# Altium PCB 175-00008 rev 2, PCB, M2 Focus Drive.PcbDoc (part 1 of 3)
Units mil, origin at the board's own origin, x right, y up, seen from the top; angles counter-clockwise.
Board outline 6885.96 x 6885.86 mil, 9 copper layers (Top Layer (*.GTL), Mid-Layer 1 (*.G1), +24V (*.GP1), GND (*.GP2), +5V (*.GP3), +12V (*.GP4), -12V (*.GP5), +3.3V (*.GP6), Bottom Layer (*.GBL)), stack 52.6 mil thick; 154 components, 154 nets, 874 pads, 365 vias.
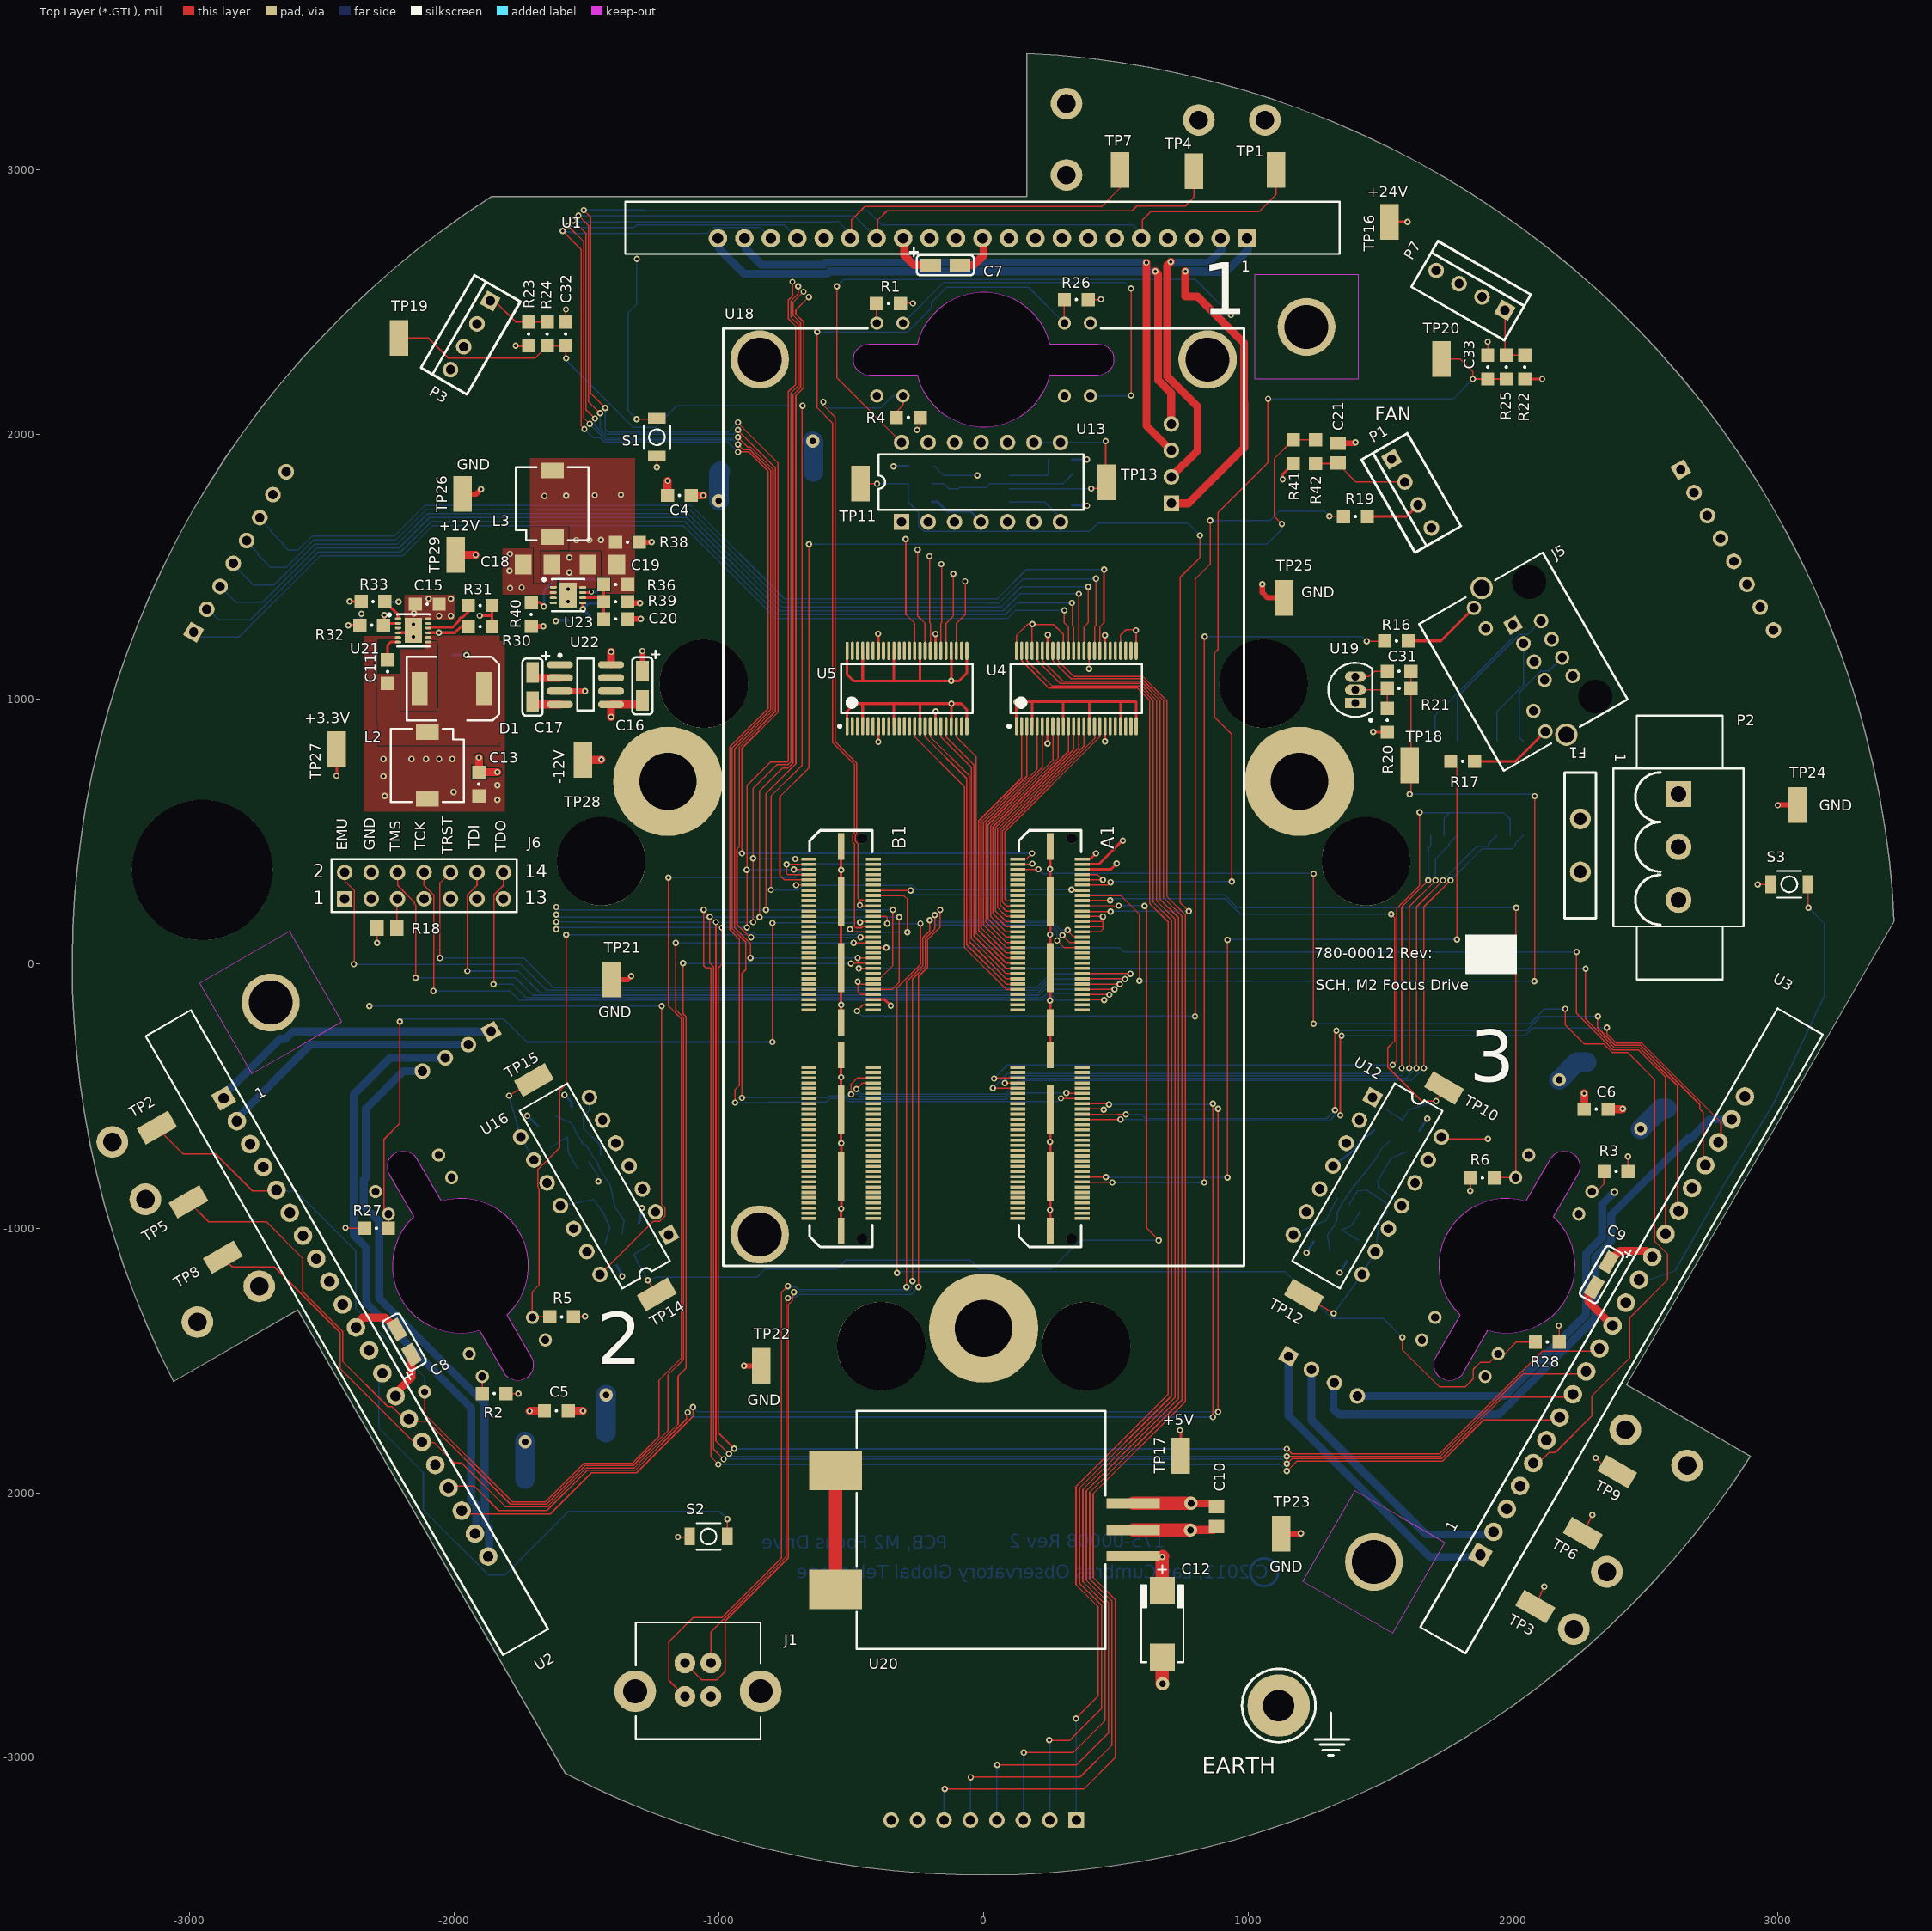
[diagram p0: Top Layer (*.GTL) view]
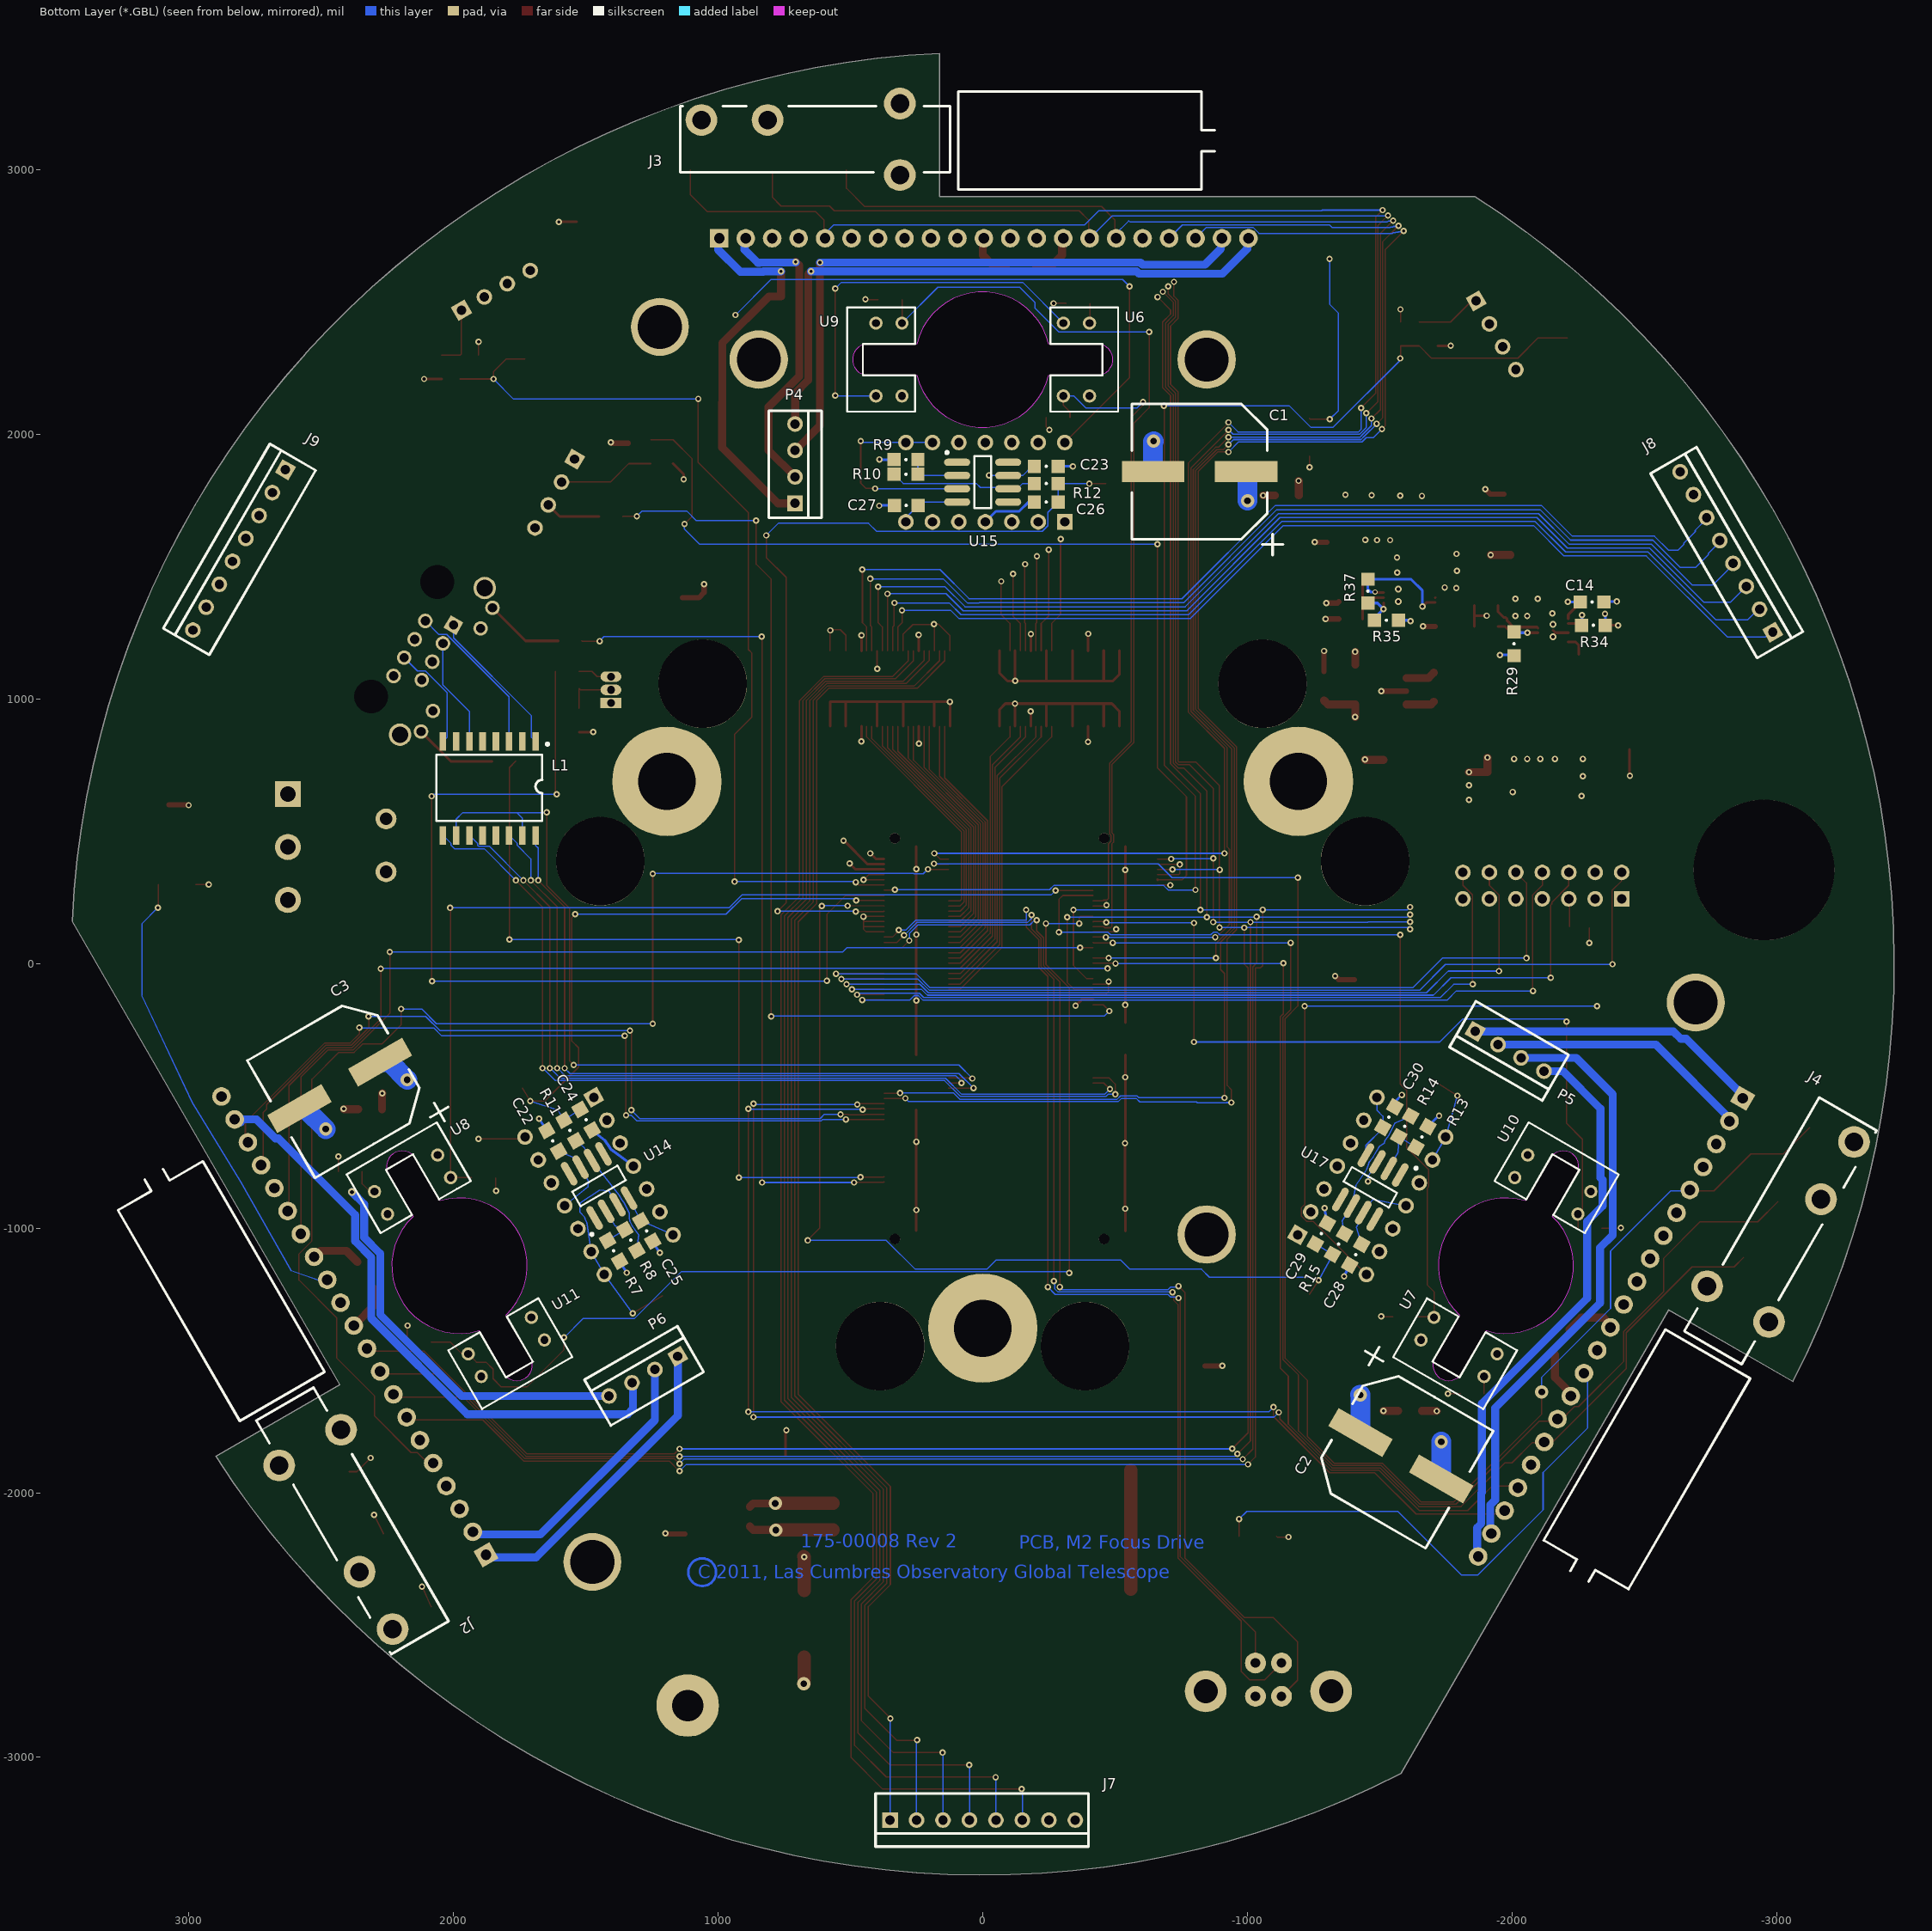
[diagram p1: Bottom Layer (*.GBL) view, seen from below]
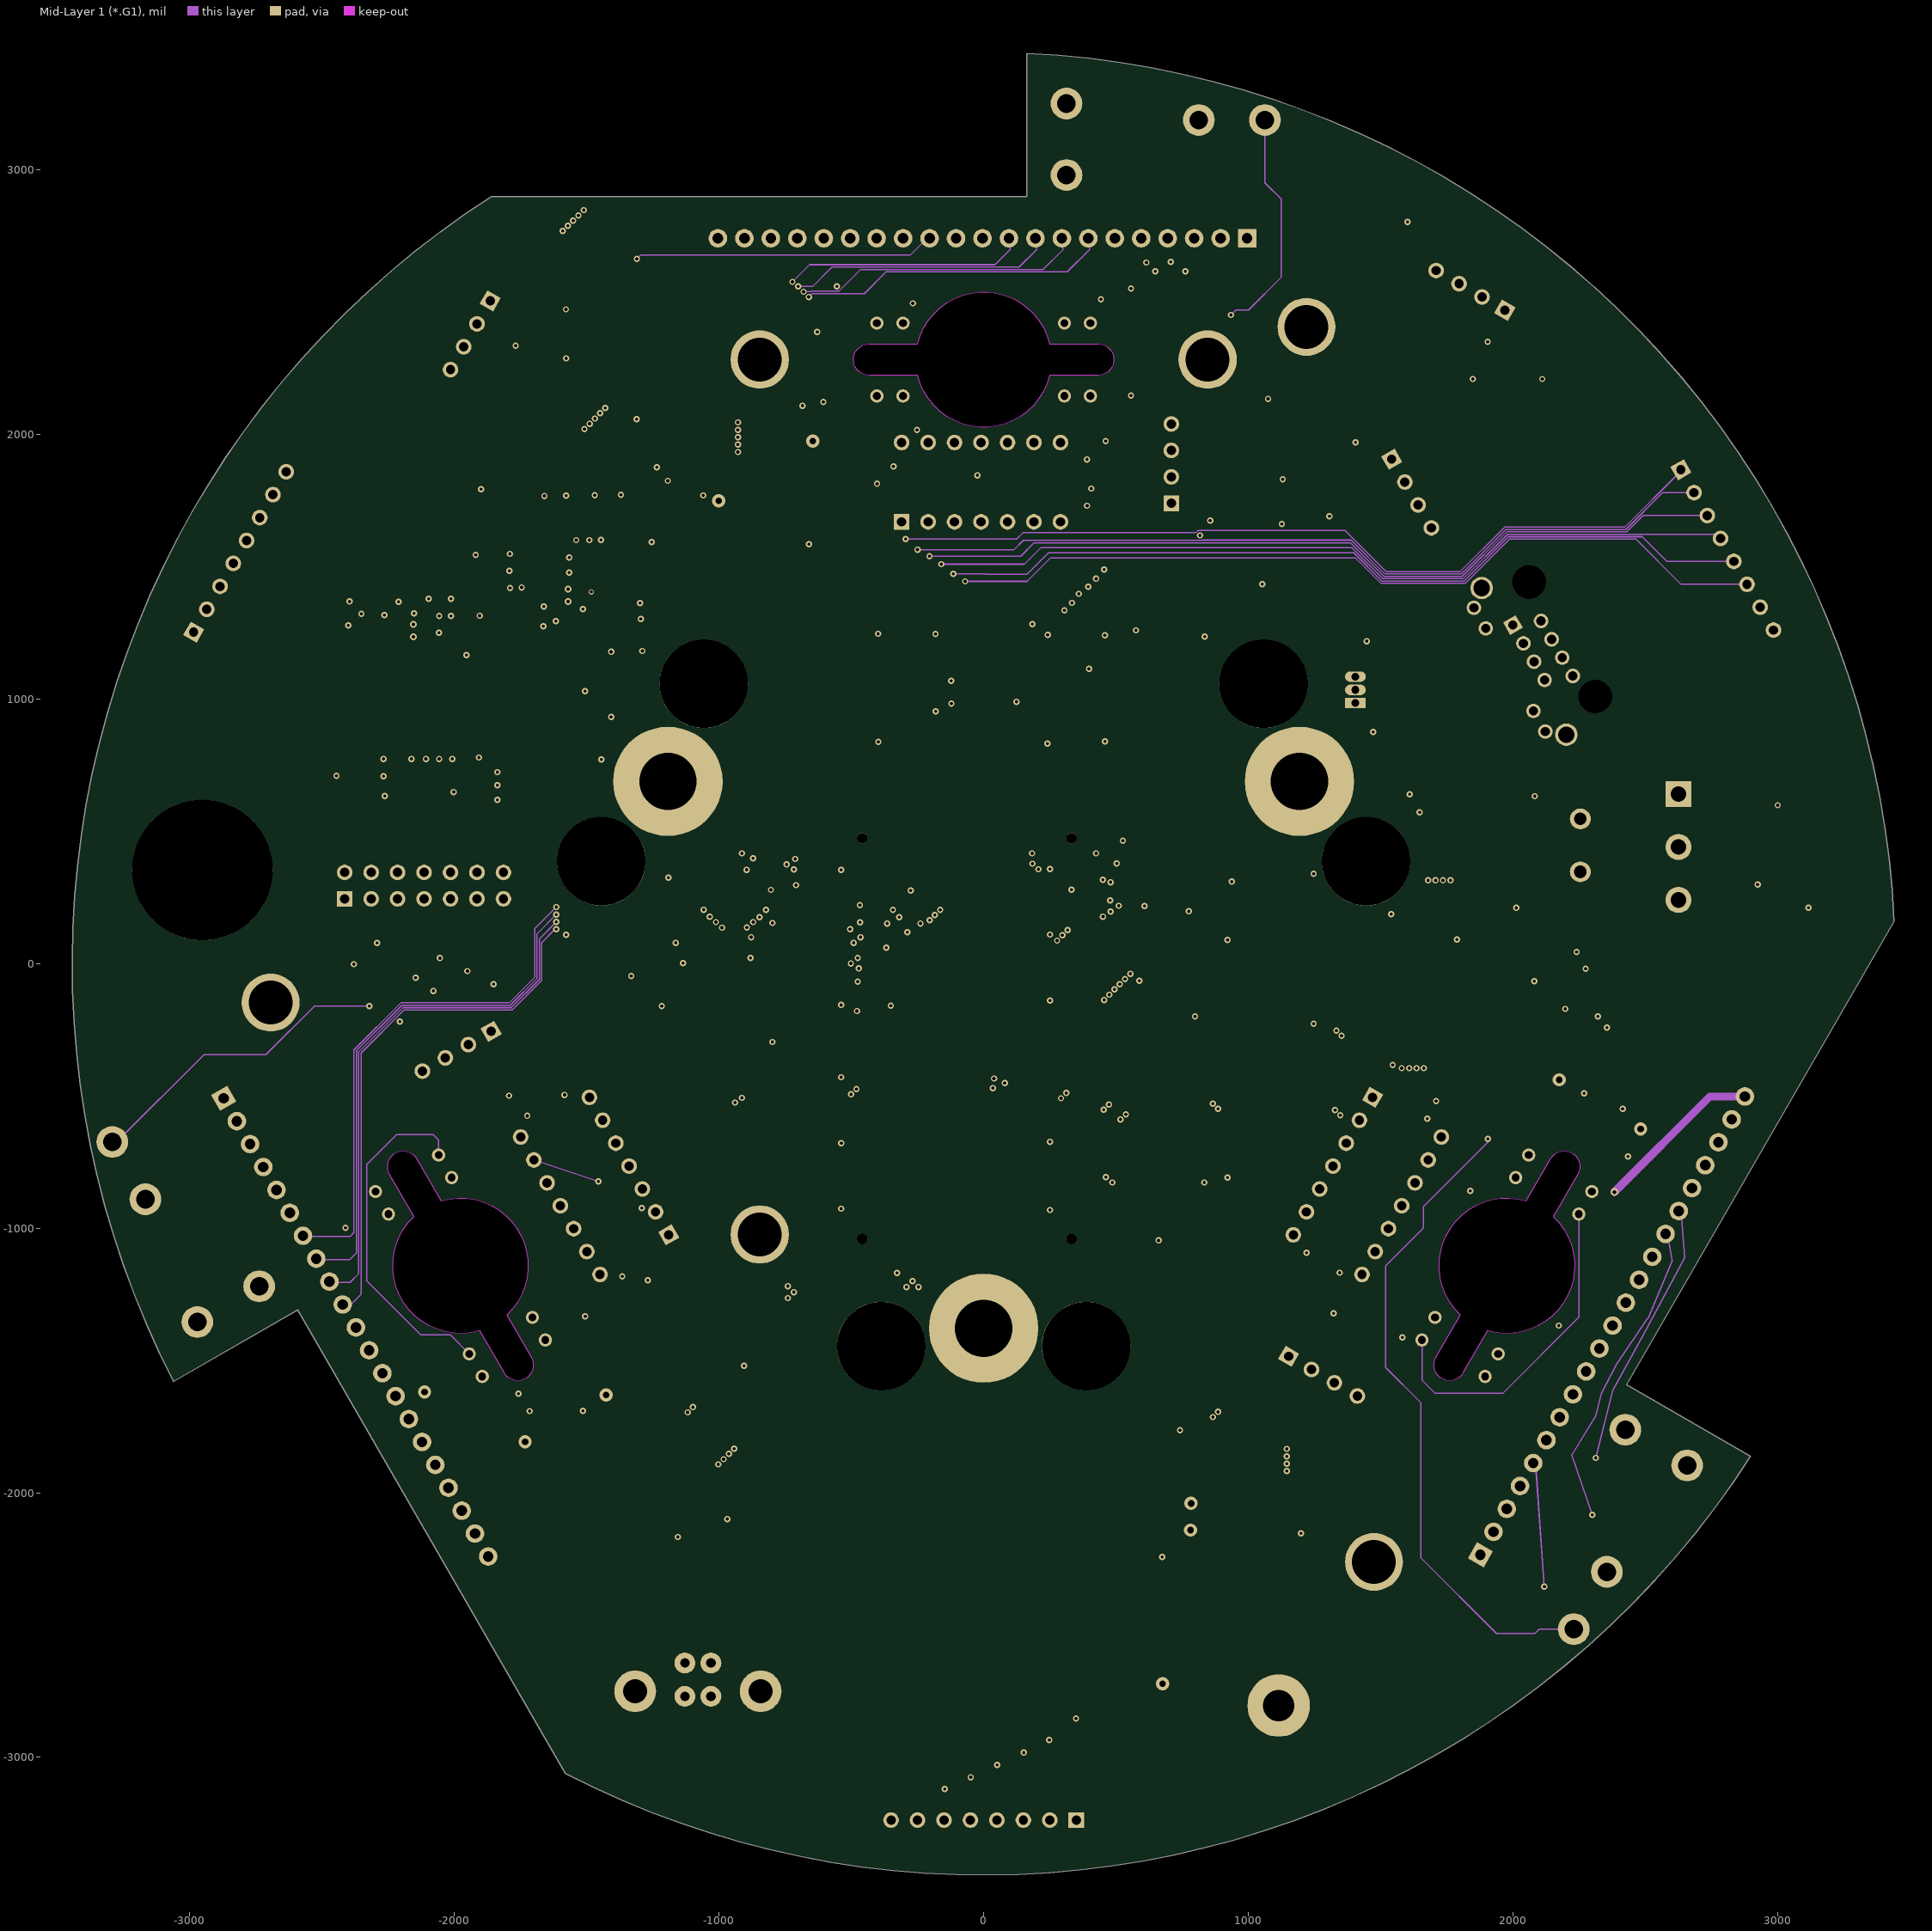
[diagram p2: Mid-Layer 1 (*.G1)]
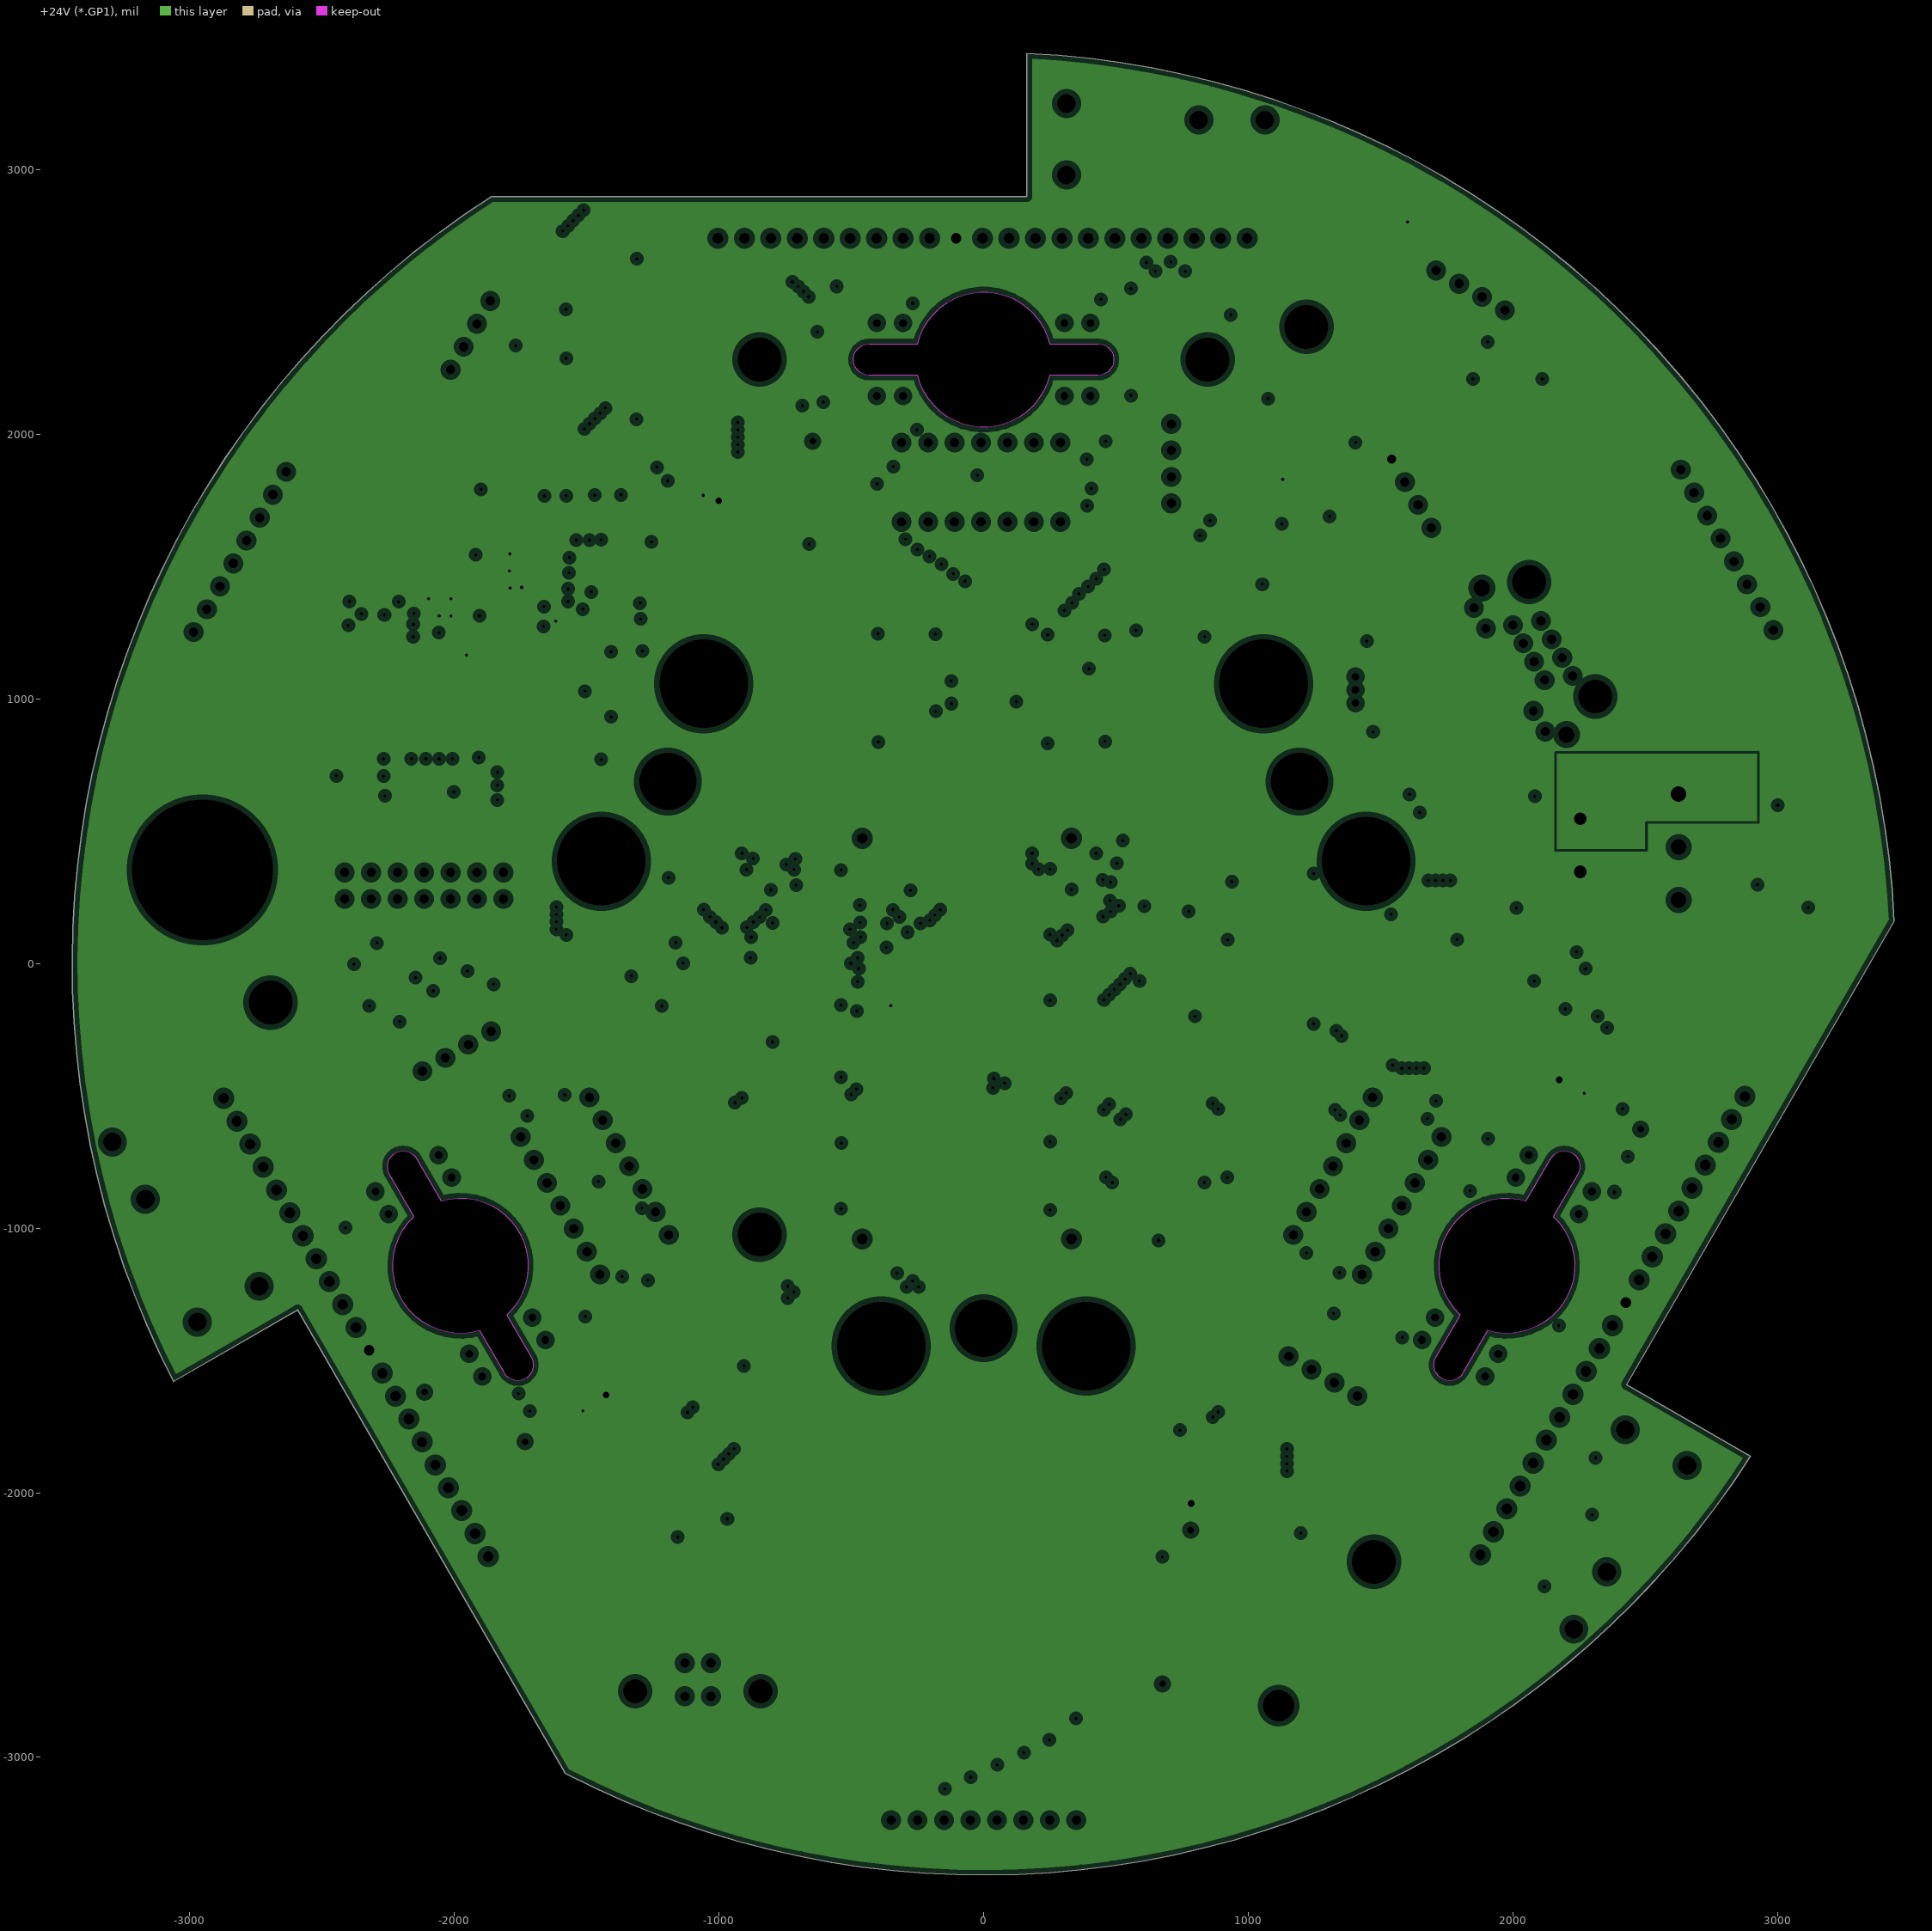
[diagram p3: +24V (*.GP1), clearances drawn from the general rule]
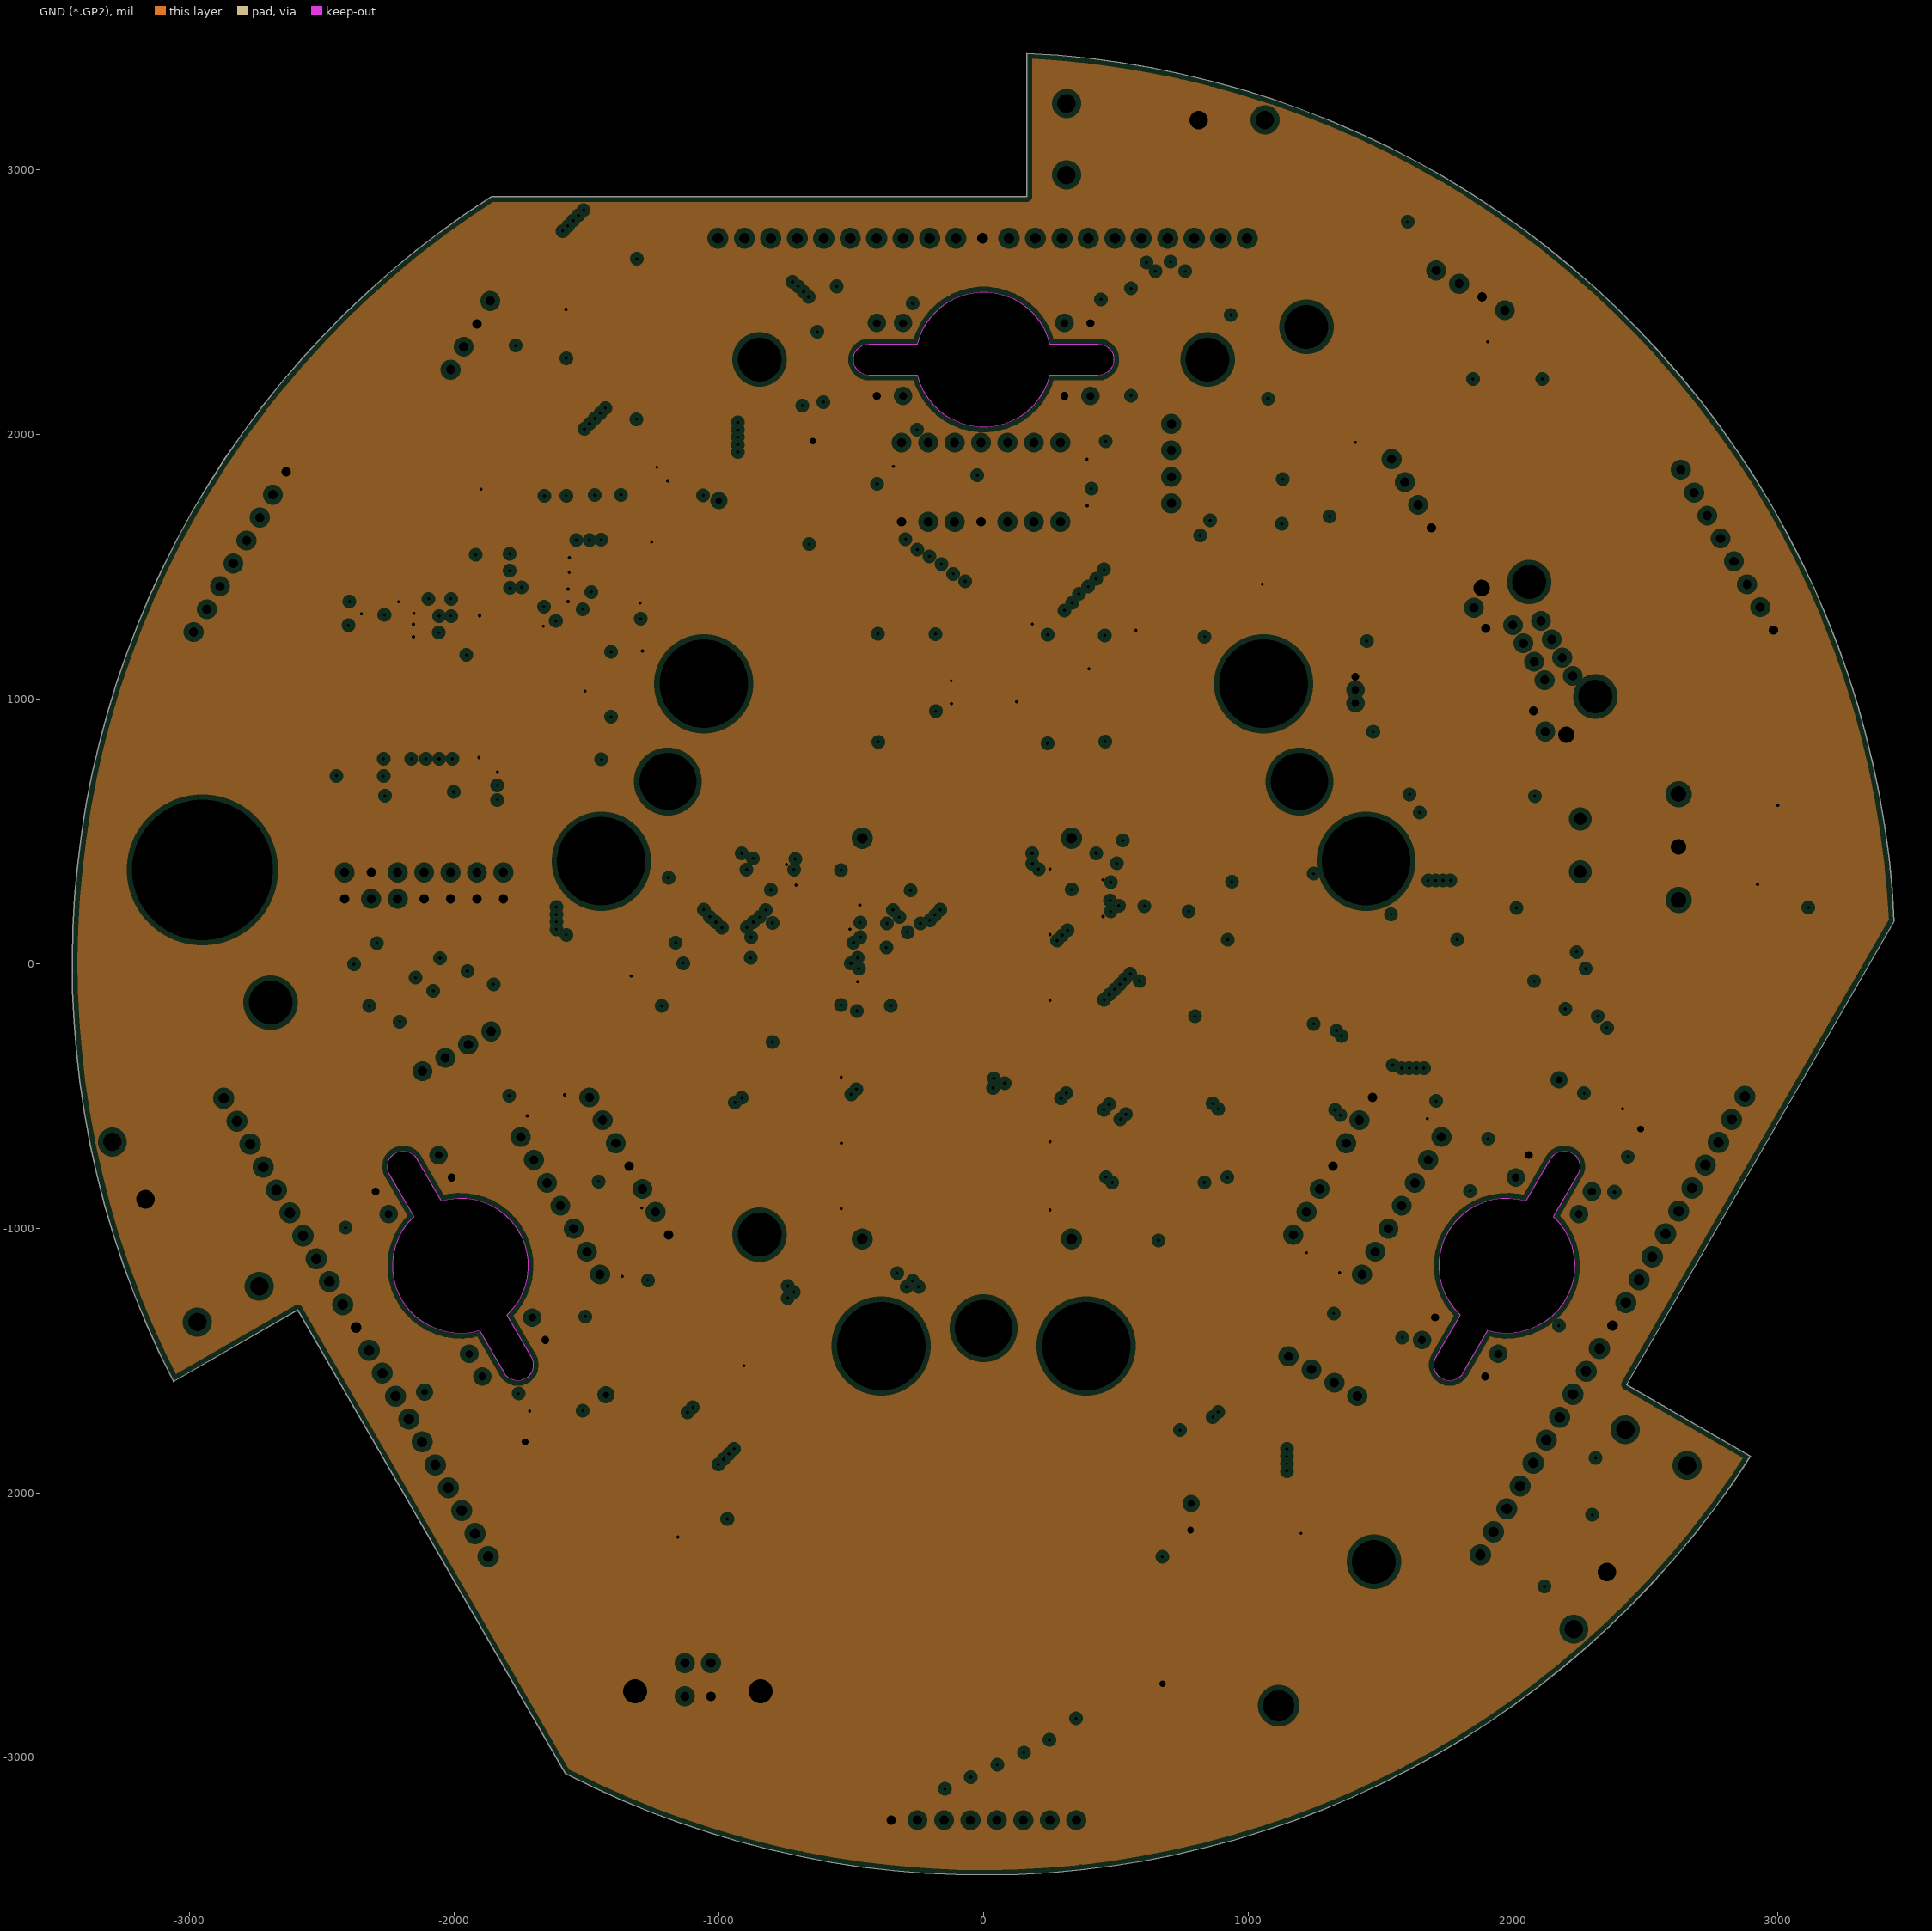
[diagram p4: GND (*.GP2), clearances drawn from the general rule]
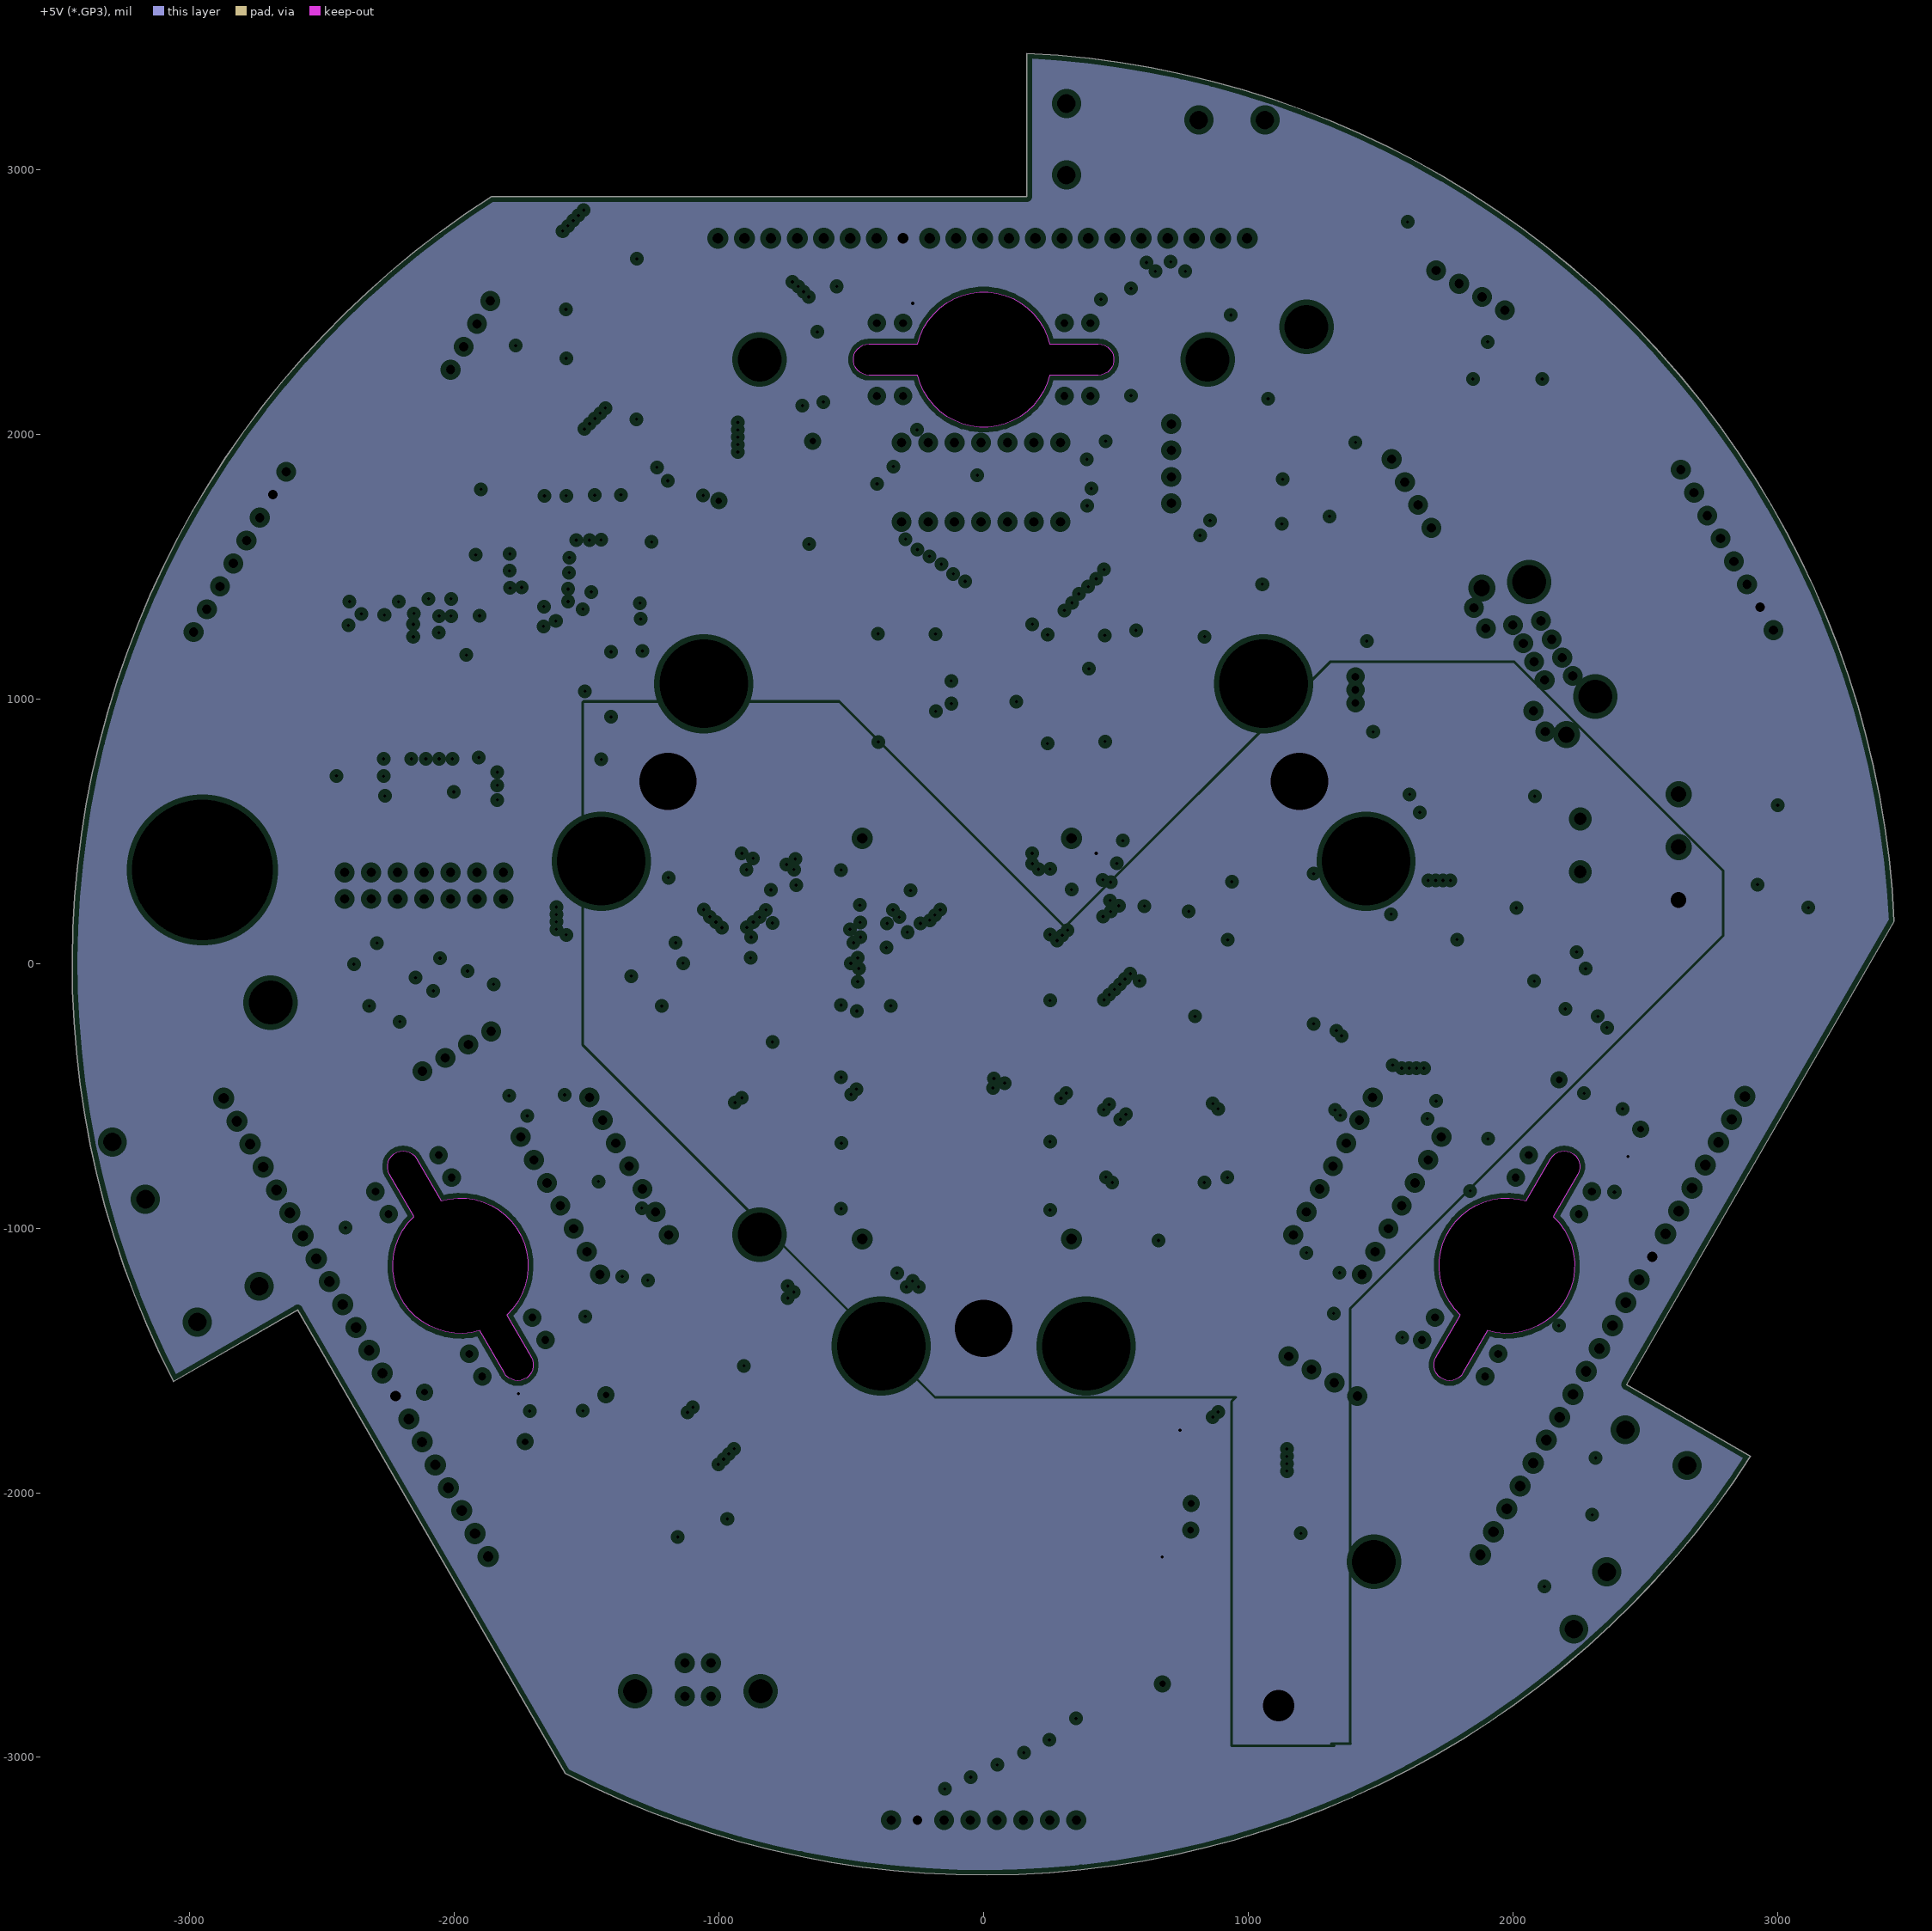
[diagram p5: +5V (*.GP3), clearances drawn from the general rule]
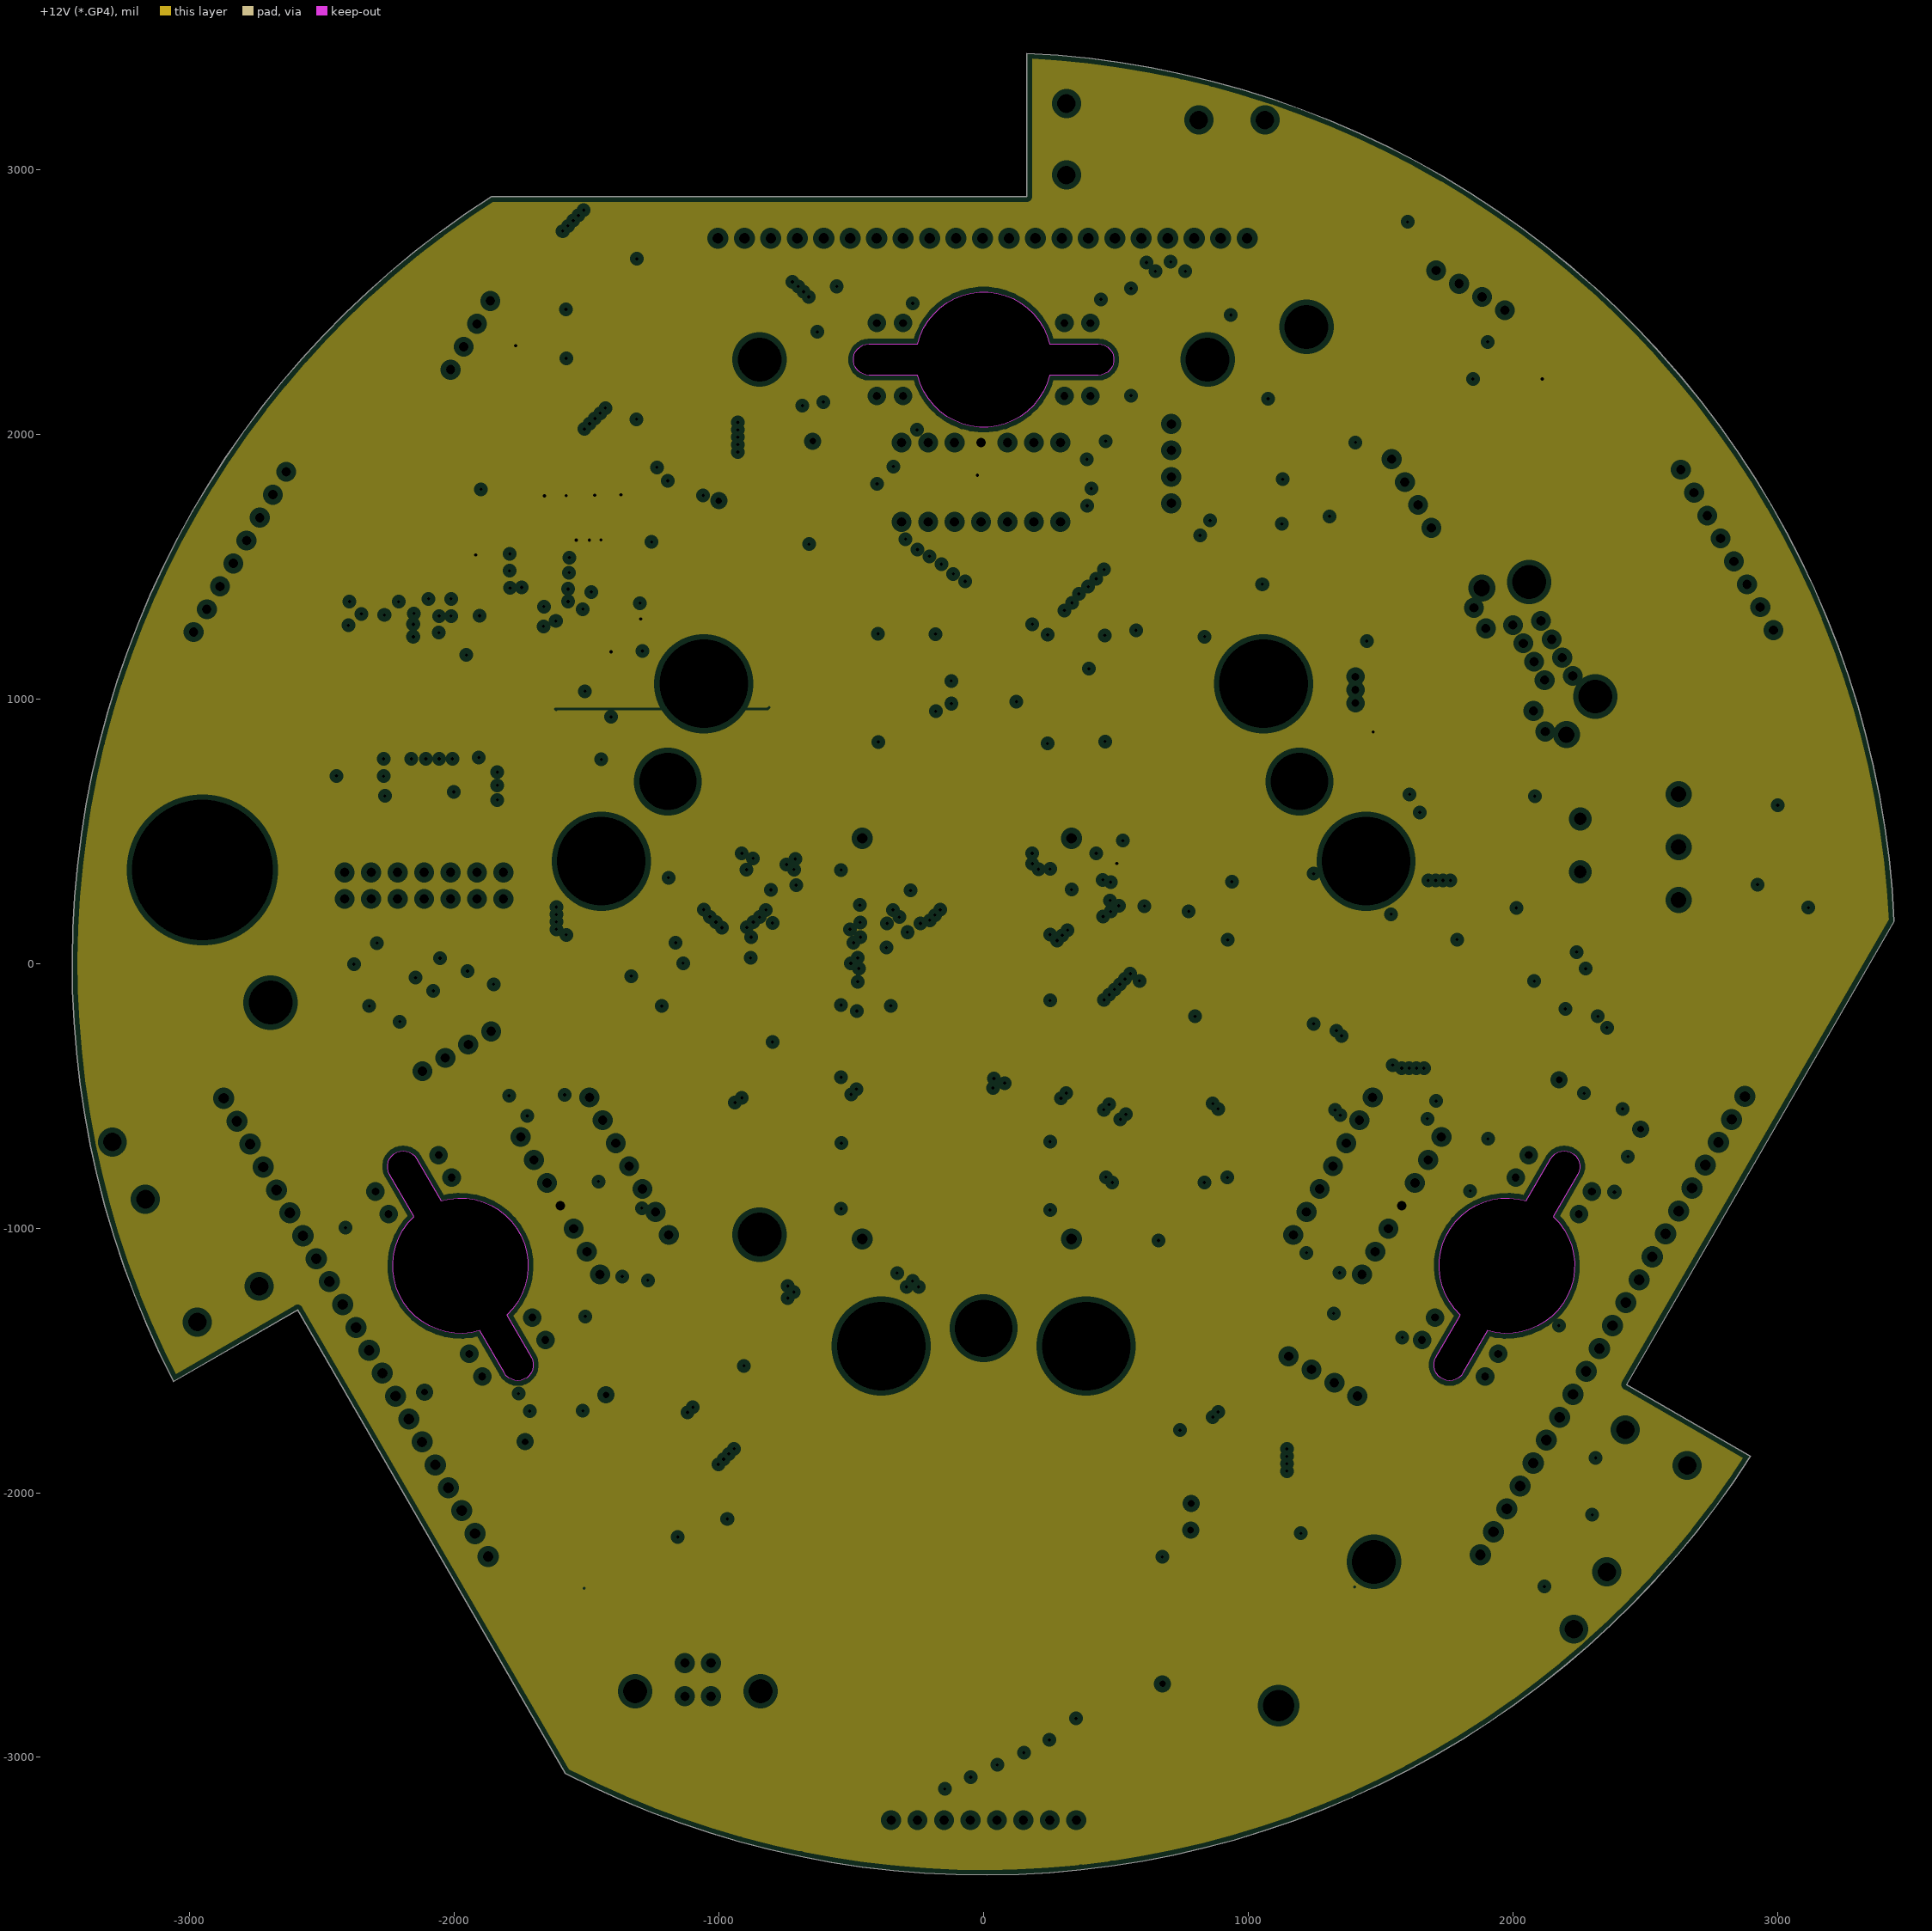
[diagram p6: +12V (*.GP4), clearances drawn from the general rule]
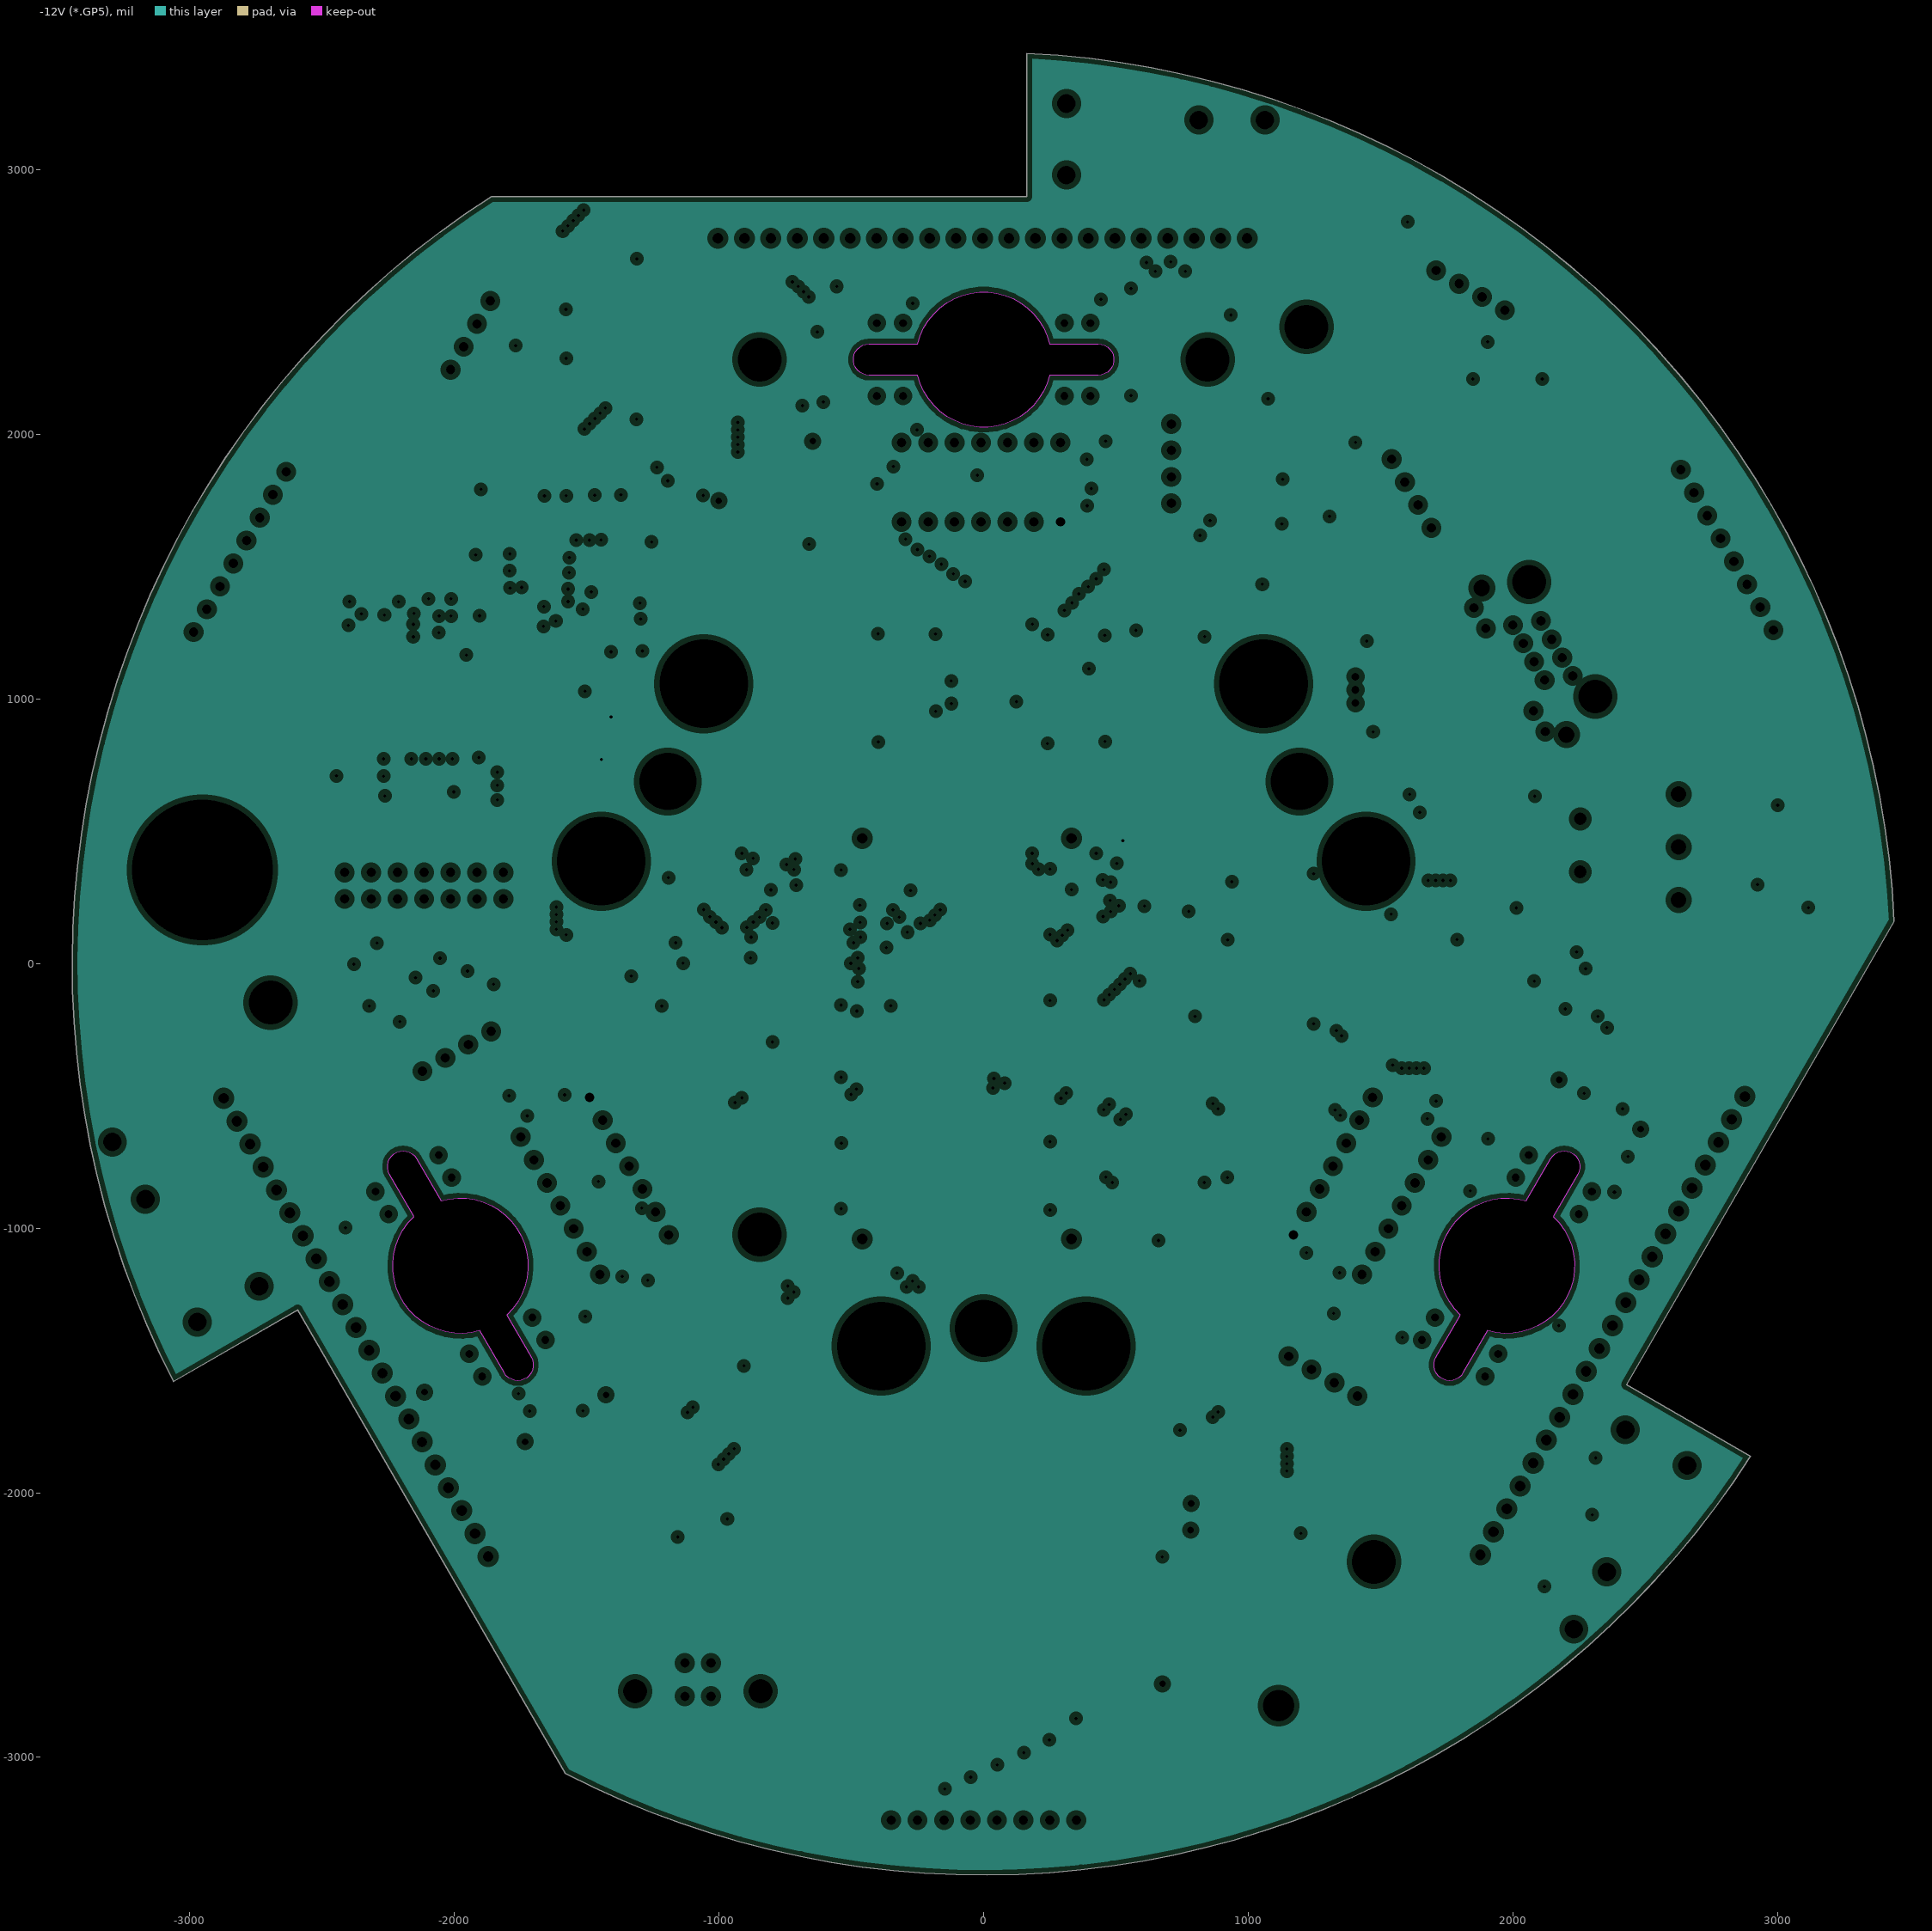
[diagram p7: -12V (*.GP5), clearances drawn from the general rule]
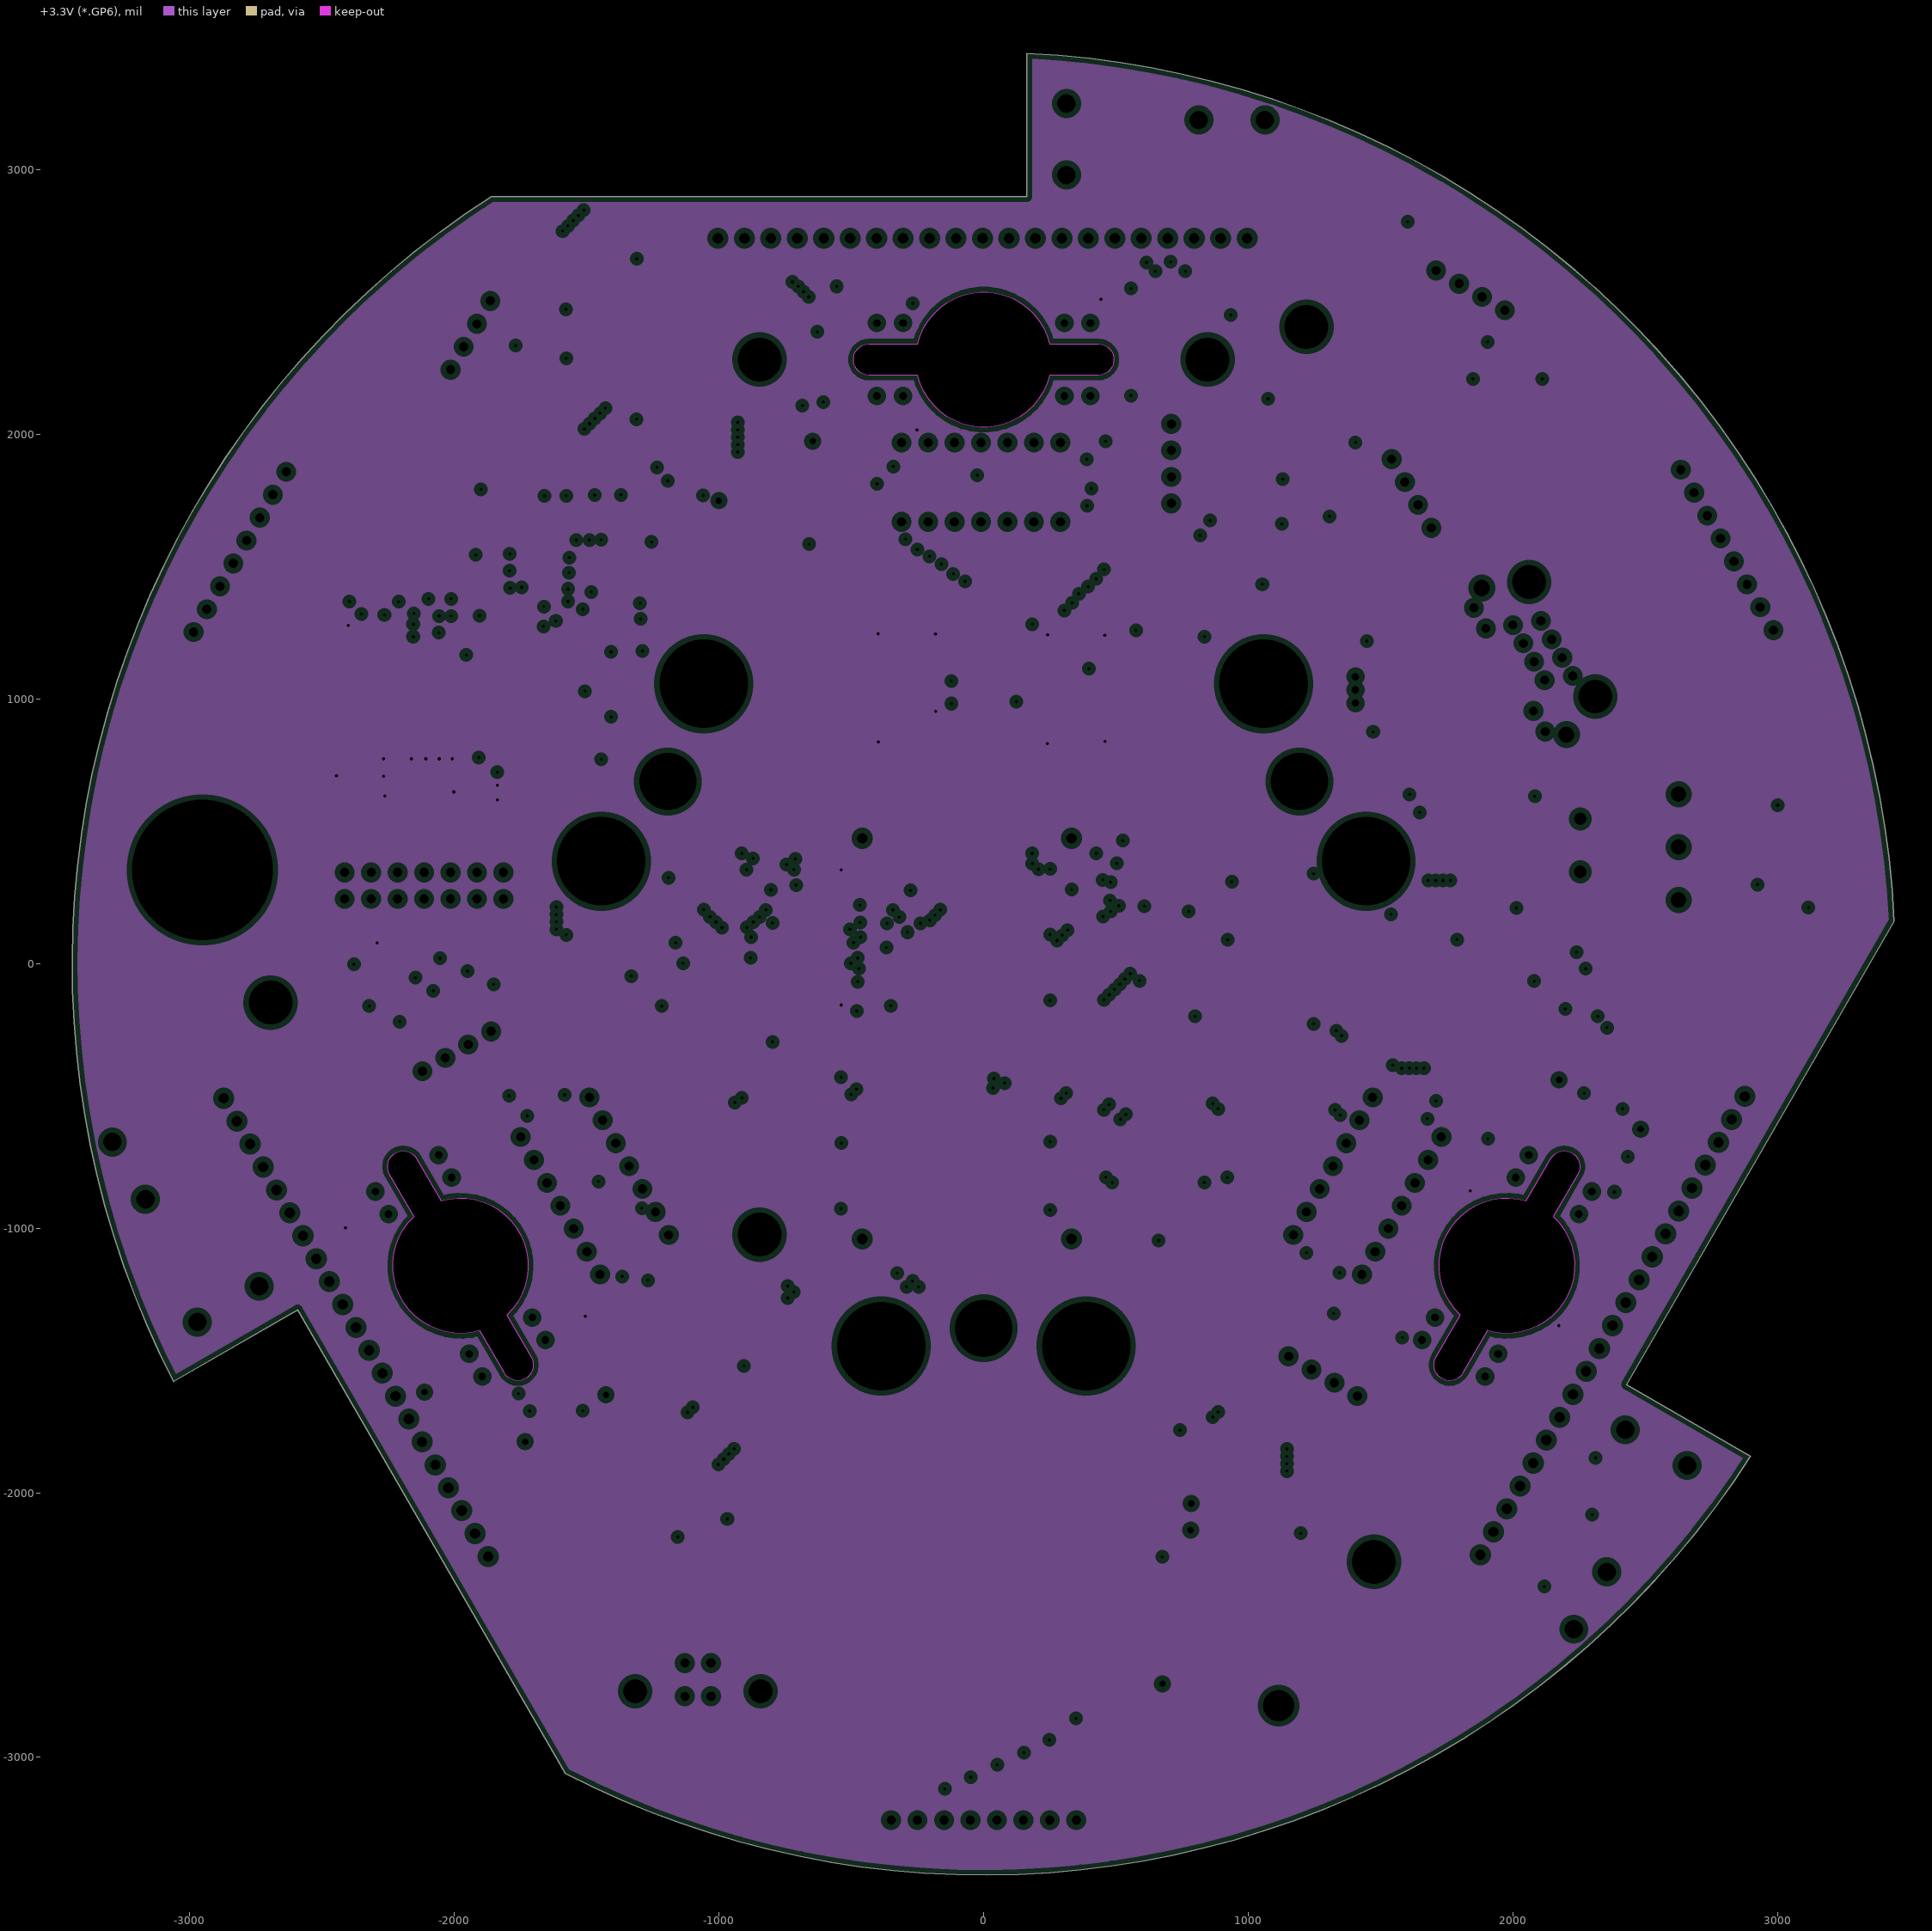
[diagram p8: +3.3V (*.GP6), clearances drawn from the general rule]

## Layer stack, top to bottom
Top Layer (*.GTL): signal copper 1.4
Dielectric: core 5, FR-4, Dk 4.8
Mid-Layer 1 (*.G1): signal copper 1.4
Dielectric: prepreg 5, FR-4, Dk 4.8
+24V (*.GP1): plane copper 1.4, net (Multiple Nets)
Dielectric: core 5, FR-4, Dk 4.8
GND (*.GP2): plane copper 1.4, net GND
Dielectric: prepreg 5, FR-4, Dk 4.8
+5V (*.GP3): plane copper 1.4, net (Multiple Nets)
Dielectric: core 5, FR-4, Dk 4.8
+12V (*.GP4): plane copper 1.4, net +12V
Dielectric: prepreg 5, FR-4, Dk 4.8
-12V (*.GP5): plane copper 1.4, net -12V
Dielectric: core 5, FR-4, Dk 4.8
+3.3V (*.GP6): plane copper 1.4, net +3.3V
Dielectric: prepreg 5, FR-4, Dk 4.8
Bottom Layer (*.GBL): signal copper 1.4

## Board outline
-3061.67,-1579.02 -2592.8,-1308.32 -1581.13,-3060.6 -1475.12,-3113.08 -1367.37,-3161.89 -1258,-3206.97 -1147.16,-3248.27 -1034.96,-3285.74 -921.54,-3319.34 -807.03,-3349.02 -691.58,-3374.76 -575.31,-3396.51 -458.36,-3414.26 -340.86,-3427.99 -222.97,-3437.67 -104.81,-3443.3 13.46,-3444.87 131.73,-3442.38 249.84,-3435.82 367.65,-3425.22 485.03,-3410.58 601.84,-3391.92 717.94,-3369.26 833.19,-3342.62 947.46,-3312.05 1060.61,-3277.56 1172.52,-3239.22 1283.04,-3197.05 1392.04,-3151.12 1499.41,-3101.47 1605.01,-3048.16 1708.71,-2991.26 1810.4,-2930.83 1909.96,-2866.95 2007.26,-2799.69 2102.2,-2729.12 2194.66,-2655.34 2284.53,-2578.43 2371.71,-2498.47 2456.09,-2415.57 2537.58,-2329.82 2616.07,-2241.33 2691.48,-2150.19 2763.71,-2056.52 2832.69,-1960.42 2898.33,-1862.01 2429.46,-1591.31 3441.14,160.97 3433.58,279.02 3421.98,396.74 3406.34,513.99 3386.69,630.63 3363.04,746.54 3335.42,861.56 3303.88,975.56 3268.43,1088.42 3229.14,1199.99 3186.04,1310.15 3139.18,1418.76 3088.61,1525.7 3034.41,1630.84 2976.63,1734.06 2915.34,1835.23 2850.61,1934.24 2782.52,2030.97 2711.15,2125.3 2636.59,2217.13 2558.91,2306.34 2478.22,2392.84 2394.61,2476.51 2308.17,2557.27 2219.01,2635 2127.23,2709.63 2032.95,2781.07 1936.27,2849.23 1837.3,2914.02 1736.17,2975.38 1633,3033.24 1527.89,3087.51 1420.99,3138.15 1312.41,3185.09 1202.28,3228.27 1090.74,3267.64 977.91,3303.16 863.92,3334.79 748.92,3362.48 633.03,3386.21 516.4,3405.95 399.16,3421.67 281.45,3433.35 163.41,3440.99 163.41,2899.59 -1859.95,2899.59 -1958.41,2834.03 -2054.55,2765.12 -2148.28,2692.95 -2239.47,2617.6 -2328.02,2539.17 -2413.82,2457.75 -2496.78,2373.42 -2576.79,2286.3 -2653.77,2196.49 -2727.62,2104.08 -2798.25,2009.19 -2865.58,1911.93 -2929.53,1812.42 -2990.03,1710.77 -3047.01,1607.11 -3100.39,1501.55 -3150.11,1394.22 -3196.12,1285.24 -3238.37,1174.75 -3276.79,1062.87 -3311.35,949.74 -3342,835.5 -3368.72,720.26 -3391.46,604.18 -3410.21,487.38 -3424.93,370.01 -3435.62,252.21 -3442.25,134.1 -3444.82,15.84 -3443.34,-102.44 -3437.79,-220.6 -3428.19,-338.5 -3414.55,-456 -3396.88,-572.96 -3375.21,-689.25 -3349.55,-804.73 -3319.95,-919.25 -3286.43,-1032.69 -3249.04,-1144.92 -3207.82,-1255.79 -3162.81,-1365.19 -3114.08,-1472.97
cut-out: -433.05,2342.51 -248.98,2342.51 -239.45,2373.67 -226.05,2403.37 -208.98,2431.13 -188.52,2456.49 -165,2479.05 -138.81,2498.43 -110.36,2514.33 -80.13,2526.48 -48.59,2534.7 -16.27,2538.84 16.31,2538.84 48.64,2534.7 80.17,2526.48 110.4,2514.33 138.85,2498.43 165.04,2479.04 188.56,2456.49 209.02,2431.13 226.09,2403.37 239.5,2373.67 249.02,2342.51 433.09,2342.51 445.37,2341.22 457.11,2337.4 467.8,2331.23 476.98,2322.97 484.24,2312.98 489.26,2301.7 491.82,2289.62 491.82,2277.28 489.26,2265.2 484.24,2253.93 476.98,2243.94 467.8,2235.68 457.11,2229.5 445.37,2225.69 433.09,2224.4 249.02,2224.4 239.5,2193.23 226.09,2163.53 209.02,2135.78 188.56,2110.42 165.04,2087.86 138.85,2068.48 110.4,2052.58 80.17,2040.42 48.64,2032.21 16.31,2028.07 -16.27,2028.07 -48.59,2032.21 -80.13,2040.42 -110.36,2052.58 -138.81,2068.48 -165,2087.86 -188.52,2110.42 -208.98,2135.78 -226.05,2163.53 -239.45,2193.23 -248.98,2224.4 -433.05,2224.4 -445.33,2225.69 -457.07,2229.5 -467.76,2235.68 -476.94,2243.94 -484.19,2253.93 -489.21,2265.2 -491.78,2277.28 -491.78,2289.63 -489.21,2301.7 -484.19,2312.98 -476.94,2322.97 -467.76,2331.23 -457.07,2337.4 -445.33,2341.22
cut-out: -1801.88,-1327.86 -1709.84,-1487.27 -1704.82,-1498.54 -1702.25,-1510.62 -1702.25,-1522.97 -1704.82,-1535.04 -1709.84,-1546.32 -1717.1,-1556.31 -1726.27,-1564.57 -1736.96,-1570.74 -1748.7,-1574.56 -1760.98,-1575.85 -1773.26,-1574.56 -1785,-1570.74 -1795.69,-1564.57 -1804.87,-1556.31 -1812.13,-1546.32 -1904.16,-1386.91 -1935.91,-1394.24 -1968.34,-1397.49 -2000.91,-1396.58 -2033.1,-1391.54 -2064.4,-1382.45 -2094.28,-1369.46 -2122.27,-1352.78 -2147.91,-1332.67 -2170.8,-1309.47 -2190.54,-1283.55 -2206.83,-1255.33 -2219.41,-1225.26 -2228.06,-1193.85 -2232.65,-1161.59 -2233.11,-1129.01 -2229.41,-1096.63 -2221.64,-1064.98 -2209.91,-1034.58 -2194.4,-1005.92 -2175.39,-979.46 -2153.16,-955.63 -2245.2,-796.22 -2250.22,-784.94 -2252.78,-772.87 -2252.78,-760.52 -2250.22,-748.44 -2245.2,-737.17 -2237.94,-727.18 -2228.76,-718.92 -2218.07,-712.74 -2206.33,-708.93 -2194.05,-707.64 -2181.77,-708.93 -2170.03,-712.74 -2159.34,-718.92 -2150.17,-727.18 -2142.91,-737.17 -2050.87,-896.58 -2019.12,-889.24 -1986.7,-886 -1954.13,-886.91 -1921.93,-891.95 -1890.64,-901.04 -1860.75,-914.03 -1832.76,-930.71 -1807.12,-950.82 -1784.24,-974.02 -1764.49,-999.94 -1748.2,-1028.16 -1735.62,-1058.22 -1726.97,-1089.64 -1722.38,-1121.9 -1721.93,-1154.48 -1725.62,-1186.86 -1733.4,-1218.5 -1745.13,-1248.9 -1760.63,-1277.57 -1779.65,-1304.03
cut-out: 2245.24,-796.22 2153.2,-955.63 2175.43,-979.46 2194.45,-1005.92 2209.95,-1034.58 2221.68,-1064.98 2229.46,-1096.63 2233.15,-1129.01 2232.69,-1161.59 2228.1,-1193.85 2219.45,-1225.27 2206.88,-1255.33 2190.58,-1283.55 2170.84,-1309.47 2147.96,-1332.67 2122.31,-1352.78 2094.32,-1369.46 2064.44,-1382.45 2033.14,-1391.54 2000.95,-1396.58 1968.38,-1397.49 1935.95,-1394.25 1904.2,-1386.91 1812.17,-1546.32 1804.91,-1556.31 1795.74,-1564.57 1785.04,-1570.74 1773.3,-1574.56 1761.02,-1575.85 1748.75,-1574.56 1737,-1570.74 1726.31,-1564.57 1717.14,-1556.31 1709.88,-1546.32 1704.86,-1535.04 1702.29,-1522.97 1702.29,-1510.62 1704.86,-1498.55 1709.88,-1487.27 1801.92,-1327.86 1779.69,-1304.03 1760.67,-1277.57 1745.17,-1248.9 1733.44,-1218.5 1725.66,-1186.86 1721.97,-1154.48 1722.42,-1121.9 1727.01,-1089.64 1735.67,-1058.22 1748.24,-1028.16 1764.53,-999.94 1784.28,-974.02 1807.16,-950.82 1832.81,-930.71 1860.8,-914.03 1890.68,-901.04 1921.97,-891.95 1954.17,-886.91 1986.74,-886 2019.17,-889.24 2050.91,-896.58 2142.95,-737.17 2150.21,-727.18 2159.38,-718.92 2170.07,-712.74 2181.82,-708.93 2194.09,-707.64 2206.37,-708.93 2218.11,-712.74 2228.81,-718.92 2237.98,-727.18 2245.24,-737.17 2250.26,-748.45 2252.83,-760.52 2252.83,-772.87 2250.26,-784.94

## Design rules (kind name [scope] priority, off if disabled: settings)
Clearance [All] p1: gap=4
ComponentClearance [(HasFootprint('SuperFin Footprint'))] p1: gap=-400 collisioncheckmode=3 verticalgap=-400 showdistances=TRUE
HoleSize [All] p1: absolutevalues=TRUE maxlimit=600 minlimit=1 maxpercent=80.000 minpercent=20.000
MinimumSolderMaskSliver [All] p1: minsoldermaskwidth=1
PlaneClearance [All] p1: clearance=20
PlaneConnect PlaneConnect_1 [(InNet('NetF1_1') OR InNet('EARTH') OR InComponent('F1') or InComponent('P2'))] p1: planeconnectstyle=Direct reliefexpansion=20 reliefentries=4 reliefconductorwidth=10 reliefairgap=10
PlaneConnect [All] p2: planeconnectstyle=Relief reliefexpansion=20 reliefentries=4 reliefconductorwidth=10 reliefairgap=10
PolygonConnect [All] p1: connectstyle=Direct reliefconductorwidth=10 reliefentries=4 polygonreliefangle="90 Angle"
RoomDefinition "780-00012-P4, rev2 Sch M2 Focus Drive" [InComponentClass('780-00012-P4, rev2 Sch M2 Focus Drive')] p1: confinementstyle=ConfineIn formatcopy=TRUE lockcomponents=FALSE outline -2746,-3442 3124.14,-3442 3124.14,2886.19 -2746,2886.19
RoomDefinition "780-00012-P3, rev2 Sch M2 Focus Drive" [InComponentClass('780-00012-P3, rev2 Sch M2 Focus Drive')] p2: confinementstyle=ConfineIn formatcopy=TRUE lockcomponents=FALSE outline -3032,-3116 3804,-3116 3804,2444 -3032,2444
RoomDefinition "780-00012-P2, rev2 Sch M2 Focus Drive" [InComponentClass('780-00012-P2, rev2 Sch M2 Focus Drive')] p3: confinementstyle=ConfineIn formatcopy=TRUE lockcomponents=FALSE outline -3458.86,-2665.81 3326.14,-2665.81 3326.14,3325.19 -3458.86,3325.19
RoomDefinition "780-00012-P1, rev2 Sch M2 Focus Drive" [InComponentClass('780-00012-P1, rev2 Sch M2 Focus Drive')] p4: confinementstyle=ConfineIn formatcopy=TRUE lockcomponents=FALSE outline -3263.86,-3615 3251.14,-3615 3251.14,3084.19 -3263.86,3084.19
RoutingVias [All] p1: holewidth=12 width=24 viastyle="Through Hole" minholewidth=12 minwidth=24 maxholewidth=25 maxwidth=50
SilkToSilkClearance [All] p1: silktosilkclearance=3
SilkscreenOverComponentPads [All] p1: minsilkscreentomaskgap=1
SolderMaskExpansion [All] p1: expansion=4
Width [All] p1: maxlimit=200 minlimit=5 preferedwidth=5
21 further rules are at their usual default settings.

## Classes and differential pairs
component class "780-00012-P4, rev2 Sch M2 Focus Drive": C10 C11 C12 C13 C14 C15 C16 C17 C18 C19 C20 C21 C31 C32 C33 D1 F1 L2 L3 P1 P2 P3 P7 R19 R20 R21 R22 R23 R24 R25 R29 R30 R31 R32 R33 R34 R35 R36 R37 R38 R39 R40 R41 R42 TP16 TP17 TP18 TP19 TP20 TP21 TP22 TP23 TP24 TP25 TP26 TP27 TP28 TP29 U19 U20 U21 U22 U23
component class "780-00012-P3, rev2 Sch M2 Focus Drive": J1 J5 J6 L1 R16 R17 R18 U18
component class "780-00012-P2, rev2 Sch M2 Focus Drive": C22 C23 C24 C25 C26 C27 C28 C29 C30 J2 J3 J4 R1 R2 R3 R4 R5 R6 R7 R8 R9 R10 R11 R12 R13 R14 R15 R26 R27 R28 TP10 TP11 TP12 TP13 TP14 TP15 U6 U7 U8 U9 U10 U11 U12 U13 U14 U15 U16 U17
component class "780-00012-P1, rev2 Sch M2 Focus Drive": C1 C2 C3 C4 C5 C6 C7 C8 C9 J7 J8 J9 P4 P5 P6 S1 S2 S3 TP1 TP2 TP3 TP4 TP5 TP6 TP7 TP8 TP9 U1 U2 U3 U4 U5

## Components (designator, comment, footprint, x,y, rotation, side; value= is the part's Value field where it differs from the comment)
C1 "63V" "CAP 220UF 63V" -819.98,1860 r270 bottom
C2 "63V" "CAP 220UF 63V" -1579.98,-1860 r120 bottom
C3 "63V" "CAP 220UF 63V" 2430.02,-460 r240 bottom
C4 "Cap SMD" SMD_0805 -1149.98,1770 r0 top
C5 "Cap SMD" SMD_0805 -1614.98,-1690 r0 top
C6 "Cap SMD" SMD_0805 2315.02,-550 r180 top
C7 "16V" SMD_CAP_3216 -144.98,2640 r180 top
C8 "16V" SMD_CAP_3216 -2189.98,-1430 r300 top
C9 "16V" SMD_CAP_3216 2335.02,-1175 r60 top
C10 "1u" 2012[0805] 880.02,-2090 r270 top
C11 "Cap SMD" SMD_0805 -2252.98,1104 r90 top
C12 "10V" SMD_CAP_7343 675.02,-2495 r90 top
C13 "16V" SMD_0805 -1907.98,679 r270 top
C14 "Cap SMD" SMD_0805 -2302.98,1367 r180 bottom
C15 "25V" SMD_0805 -2102.98,1359 r0 top
C16 "16V" SMD_CAP_3216 -1289.98,1050 r90 top
C17 "16V" SMD_CAP_3216 -1704.98,1045 r90 top
C18 "Low ESR" SMD_1206 -1685.98,1508 r180 top
C19 "Low ESR" SMD_1206 -1440.98,1508 r0 top
C20 "Cap SMD" SMD_0805 -1390.98,1303 r0 top
C21 "1u" 2012[0805] 1340,1929.63 r90 top
C22 "Cap SMD" SMD_0805 1625.02,-670 r240 bottom
C23 "Cap SMD" SMD_0805 -239.98,1880 r0 bottom
C24 "Cap SMD" SMD_0805 1499.02,-590 r60 bottom
C25 "Cap SMD" SMD_0805 1270.02,-1010 r60 bottom
C26 "Cap SMD" SMD_0805 -239.98,1745 r180 bottom
C27 "Cap SMD" SMD_0805 289.02,1732 r180 bottom
C28 "Cap SMD" SMD_0805 -1409.98,-1100 r120 bottom
C29 "Cap SMD" SMD_0805 -1279.98,-1020 r300 bottom
C30 "Cap SMD" SMD_0805 -1534.98,-580 r300 bottom
C31 "Cap SMD" SMD_0805 1570.02,1105 r0 top
C32 "Cap SMD" SMD_0805 -1579.98,2380 r270 top
C33 "Cap SMD" SMD_0805 1905.02,2255 r270 top
D1 "SL43-E3/57T" DO-214AB -2010,1040 r0 top
Designator17 "Comment" "TARGET MECHANICAL 5" -3045,-3814 r180 bottom
Designator18 "Comment" "TARGET MECHANICAL 5" -3457,3853 r180 bottom
Designator19 "Comment" "TARGET MECHANICAL 5" 4145,3672 r180 bottom
F1 "RUEF400" "PolySwitch Radial 0.2" 2255,447.19 r270 top
J1 "61729-0010BLF" "USB Vertical PCB" -843,-2750 r0 top
J2 "PCC-SMP-V-K" THERMOCOUPLE 2658.95,-1896.56 r240 bottom
J3 "PCC-SMP-V-K" THERMOCOUPLE 313.01,3250.96 r0 bottom
J4 "PCC-SMP-V-K" THERMOCOUPLE -2971.9,-1354.44 r120 bottom
J5 "RJHSE-3381" "RJ45, VERT MOUNT, NO MAGNETICS" 2000.02,1280 r120 top
J6 "15-91-0140" HDR2X7 -2414.98,245 r0 top
J7 "Header 8" "HDR1X8 for IDC" 350,-3237 r180 bottom
J8 "Header 8" "HDR1X8 for IDC" -2986,1253 r60 bottom
J9 "Header 8" "HDR1X8 for IDC" 2635,1867 r300 bottom
L1 "S558-5999-J1-F" "10/100BT Magetics module" 1690.02,840 r0 bottom
L2 "445-3869-1-ND" "Inductor TDC SLF" -2102.98,749 r0 top
L3 "445-3872-2-ND" "Inductor TDC SLF" -1630.98,1738 r180 top
P1 "Header 4" "HDR1X4 for IDC" 1542,1907 r300 top
P2 "Header PWR 3 Pin" "HDR-3 PIN W/SCREW" 2626,341 r270 top
P3 "Header 4" "HDR1X4 for IDC" -1864.98,2505 r240 top
P4 "Header 4" "HDR1X4 for IDC" 709.02,1740 r90 bottom
P5 "Header 4" "HDR1X4 for IDC" -1861.36,-255.99 r210 bottom
P6 "Header 4" "HDR1X4 for IDC" 1152.41,-1484.01 r330 bottom
P7 "Header 4" "HDR1X4 for IDC" 1970.02,2470 r150 top
R1 "Res 0805" SMD_0805 -359.98,2495 r0 top
R2 "Res 0805" SMD_0805 -1849.98,-1625 r0 top
R3 "Res 0805" SMD_0805 2390.02,-785 r0 top
R4 "Res 0805" SMD_0805 -284.98,2065 r0 top
R5 "Res 0805" SMD_0805 -1594.98,-1335 r0 top
R6 "Res 0805" SMD_0805 1885.02,-810 r180 top
R7 "Res 0805" SMD_0805 1395.02,-1085 r60 bottom
R8 "Res 0805" SMD_0805 1330.02,-1045 r240 bottom
R9 "Res 0805" SMD_0805 290.02,1905 r180 bottom
R10 "Res 0805" SMD_0805 290.02,1850 r0 bottom
R11 "Res 0805" SMD_0805 1560.02,-630 r60 bottom
R12 "Res 0805" SMD_0805 -239.98,1815 r180 bottom
R13 "Res 0805" SMD_0805 -1659.98,-655 r300 bottom
R14 "Res 0805" SMD_0805 -1594.98,-615 r120 bottom
R15 "Res 0805" SMD_0805 -1344.98,-1060 r300 bottom
R16 "Res 0805" SMD_0805 1560.02,1220 r0 top
R17 "Res 0805" SMD_0805 1810.02,765 r0 top
R18 "4.7k" 2012[0805] -2254.98,135 r180 top
R19 "Res 0805" SMD_0805 1405.02,1690 r0 top
R20 "Res3" smd_0805 1525.02,920 r90 top
R21 "Res SMD" SMD_0805 1570.02,1040 r180 top
R22 "Res3" smd_0805 2045.02,2255 r90 top
R23 "Res3" smd_0805 -1719.98,2380 r90 top
R24 "Res SMD" SMD_0805 -1649.98,2380 r90 top
R25 "Res SMD" SMD_0805 1975.02,2255 r90 top
R26 "Res 0805" SMD_0805 350.02,2510 r0 top
R27 "Res 0805" SMD_0805 -2294.98,-1000 r180 top
R28 "Res 0805" SMD_0805 2130.02,-1430 r0 top
R29 "Res 0805" SMD_0805 -2007.98,1209 r90 bottom
R30 "Res 0805" SMD_0805 -1902.98,1274 r180 top
R31 "Res 0805" SMD_0805 -1902.98,1354 r180 top
R32 "Res 0805" SMD_0805 -2312.98,1279 r180 top
R33 "Res 0805" SMD_0805 -2307.98,1369 r0 top
R34 "Res 0805" SMD_0805 -2307.98,1279 r0 bottom
R35 "Res 0805" SMD_0805 -1525.98,1298 r180 bottom
R36 "Res 0805" SMD_0805 -1390.98,1433 r0 top
R37 "Res 0805" SMD_0805 -1455.98,1408 r270 bottom
R38 "Res 0805" SMD_0805 -1345.98,1593 r180 top
R39 "Res 0805" SMD_0805 -1390.98,1368 r180 top
R40 "Res 0805" SMD_0805 -1709.98,1320 r90 top
R41 "Res 0805" SMD_0805 1170,1935 r270 top
R42 "Res 0805" SMD_0805 1255,1935 r270 top
S1 "B3U-1000P" B3U-1000P -1234.98,1990 r90 top
S2 "B3U-1000P" B3U-1000P -1039.98,-2165 r0 top
S3 "B3U-1000P" B3U-1000P 3045.02,300 r0 top
TP1 "Test Point SMD" "SMD_TEST POINT" 1105.02,3000 r90 top
TP2 "Test Point SMD" "SMD_TEST POINT" -3124.98,-620 r30 top
TP3 "Test Point SMD" "SMD_TEST POINT" 2085.02,-2430 r150 top
TP4 "Test Point SMD" "SMD_TEST POINT" 795.02,2995 r90 top
TP5 "Test Point SMD" "SMD_TEST POINT" -3004.98,-900 r30 top
TP6 "Test Point SMD" "SMD_TEST POINT" 2265.02,-2155 r150 top
TP7 "Test Point SMD" "SMD_TEST POINT" 515.02,3000 r90 top
TP8 "Test Point SMD" "SMD_TEST POINT" -2874.98,-1110 r30 top
TP9 "Test Point SMD" "SMD_TEST POINT" 2395.02,-1920 r150 top
TP10 "Test Point SMD" "SMD_TEST POINT" 1740.02,-470 r330 top
TP11 "Test Point SMD" "SMD_TEST POINT" -464.98,1815 r90 top
TP12 "Test Point SMD" "SMD_TEST POINT" 1210.02,-1255 r150 top
TP13 "Test Point SMD" "SMD_TEST POINT" 465.02,1820 r270 top
TP14 "Test Point SMD" "SMD_TEST POINT" -1234.98,-1250 r30 top
TP15 "Test Point SMD" "SMD_TEST POINT" -1699.98,-440 r30 top
TP16 "Test Point SMD" "SMD_TEST POINT" 1534.02,2804 r90 top
TP17 "Test Point SMD" "SMD_TEST POINT" 745.02,-1860 r90 top
TP18 "Test Point SMD" "SMD_TEST POINT" 1610.02,750 r90 top
TP19 "Test Point SMD" "SMD_TEST POINT" -2209.98,2365 r90 top
TP20 "Test Point SMD" "SMD_TEST POINT" 1730.02,2285 r90 top
TP21 "Test Point SMD" "SMD_TEST POINT" -1404.98,-60 r90 top
TP22 "Test Point SMD" "SMD_TEST POINT" -839.98,-1520 r90 top
TP23 "Test Point SMD" "SMD_TEST POINT" 1125.02,-2155 r90 top
TP24 "Test Point SMD" "SMD_TEST POINT" 3075.02,600 r90 top
TP25 "Test Point SMD" "SMD_TEST POINT" 1134.02,1383 r90 top
TP26 "Test Point SMD" "SMD_TEST POINT" -1969.98,1775 r90 top
TP27 "Test Point SMD" "SMD_TEST POINT" -2444.98,810 r90 top
TP28 "Test Point SMD" "SMD_TEST POINT" -1514.98,770 r90 top
TP29 "Test Point SMD" "SMD_TEST POINT" -1994.98,1545 r90 top
U1 "IM481H Plus" "IM481H VERTICAL" -4.39,2741.64 r180 top
U2 "IM481H Plus" "IM481H VERTICAL" -2372.59,-1374.7 r300 top
U3 "IM481H Plus" "IM481H VERTICAL" 2377.04,-1367.96 r60 top
U4 "SN74AHCT16244DGGR" DGG048_N 350.02,1040 r90 top
U5 "SN74AHCT16244DGGR" DGG048_N -289.98,1040 r90 top
U6 "EE-SX1046" PHOTO-SENSOR -305.1,2421.25 r270 bottom
U7 "EE-SX1046" PHOTO-SENSOR -1944.29,-1474.88 r30 bottom
U8 "EE-SX1046" PHOTO-SENSOR 2249.45,-946.4 r150 bottom
U9 "EE-SX1046" PHOTO-SENSOR 305.14,2145.66 r90 bottom
U10 "EE-SX1046" PHOTO-SENSOR -2010.74,-808.61 r210 bottom
U11 "EE-SX1046" PHOTO-SENSOR 1705.67,-1337.09 r330 bottom
U12 "AD595AQ" Q-14_A 1450.02,-840 r240 top
U13 "AD595AQ" Q-14_A -9.98,1820 r0 top
U14 "LT1007CS8#PBF" S8_M 1450.02,-840 r60 bottom
U15 "LT1007CS8#PBF" S8_M 0.02,1820 r180 bottom
U16 "AD595AQ" Q-14_A -1469.98,-840 r120 top
U17 "LT1007CS8#PBF" S8_M -1464.98,-845 r300 bottom
U18 "SuperFin Module" "SUPERFIN FOOTPRINT" 846.48,-1023.63 r90 top locked
U19 "LM335Z" Z03A 1405.02,1035 r0 top
U20 "PT78ST105S" PSIP_3_SMD -9.98,-2140 r90 top
U21 "LT3682" DD12/DFN12 -2212.98,1304 r0 top
U22 "LTC1144" S8_M -1504.98,1055 r0 top
U23 "LTC3631" DD8/DFN8 -1570.98,1393 r0 top

## Footprints (in the part's own frame and the unit in brackets; to place one, negate y for a bottom-side part, rotate by r counter-clockwise, add the part's x,y. Pads: shape width x height; smd on the part's side, far side on the other; paste and mask are expansions set on the pad)
"10/100BT Magetics module" [mil] "bel p/n S558-6-5999-J1-F"
  rect 25x70 smd: 1(0,0) 2(50,0) 3(100,0) 4(150,0) 5(200,0) 6(250,0) 7(300,0) 8(350,0) 9(350,355) 10(300,355) 11(250,355) 12(200,355) 13(150,355) 14(100,355) 15(50,355) 16(0,355)
  silkscreen extent -50,5 375,300
2012[0805] [mm] "Chip Resistor; Body 2.0 x 1.3 mm (LxW typ)"
  rect 1.3x1.5 smd: 1(-0.95,0) 2(0.95,0)
B3U-1000P [mil] "Pushbutton without ground terminal, without boss"
  rect 40x67 smd: 1(-71,0) 2(71,0)
  silkscreen extent -45,-50 45,50
"CAP 220UF 63V" [mm] "United Chemi-Con size KG5"
  rect 2x6 smd: 1(0,4.475) 2(0,-4.475)
  silkscreen extent -6.5,-6.5 8,8
DD8/DFN8 [mm]
  oval 0.675x0.25 smd: 1(-1.412,0.75) 2(-1.412,0.25) 3(-1.412,-0.25) 4(-1.412,-0.75) 5(1.412,-0.75) 6(1.412,-0.25) 7(1.412,0.25) 8(1.412,0.75)
  rect 1.65x2.38 smd: 9(0,0)
  silkscreen extent -2.42,-1.55 1.55,1.62, body extent -1.55,-1.55 1.55,1.55, height 0.8
DD12/DFN12 [mm] "SON, 12-Leads, Body 3x3 mm, Pitch 0.45mm, IPC High Density"
  oval 0.6x0.25 smd: 1(0,0) 2(0,-0.45) 3(0,-0.9) 4(0,-1.35) 5(0,-1.8) 6(0,-2.25) 7(2.9,-2.25) 8(2.9,-1.8) 9(2.9,-1.35) 10(2.9,-0.9) 11(2.9,-0.45) 12(2.9,0)
  rect 1.65x2.38 smd: 13(1.45,-1.125)
  silkscreen extent -0.97,-2.68 3,0.5, body extent -0.1,-2.68 3,0.42, height 0.8
DGG048_N [mm] "TSSOP, 48-Leads, Body 12.5x6.1mm, Pitch 0.5mm, IPC Medium Density"
  oval 1.75x0.3 smd: 1(-3.625,5.75) 2(-3.625,5.25) 3(-3.625,4.75) 4(-3.625,4.25) 5(-3.625,3.75) 6(-3.625,3.25) 7(-3.625,2.75) 8(-3.625,2.25) 9(-3.625,1.75) 10(-3.625,1.25) 11(-3.625,0.75) 12(-3.625,0.25) 13(-3.625,-0.25) 14(-3.625,-0.75) 15(-3.625,-1.25) 16(-3.625,-1.75) 17(-3.625,-2.25) 18(-3.625,-2.75) 19(-3.625,-3.25) 20(-3.625,-3.75) 21(-3.625,-4.25) 22(-3.625,-4.75) 23(-3.625,-5.25) 24(-3.625,-5.75) 25(3.625,-5.75) 26(3.625,-5.25) 27(3.625,-4.75) 28(3.625,-4.25) 29(3.625,-3.75) 30(3.625,-3.25) 31(3.625,-2.75) 32(3.625,-2.25) 33(3.625,-1.75) 34(3.625,-1.25) 35(3.625,-0.75) 36(3.625,-0.25) 37(3.625,0.25) 38(3.625,0.75) 39(3.625,1.25) 40(3.625,1.75) 41(3.625,2.25) 42(3.625,2.75) 43(3.625,3.25) 44(3.625,3.75) 45(3.625,4.25) 46(3.625,4.75) 47(3.625,5.25) 48(3.625,5.75)
  silkscreen extent -3.75,-6.3 2.35,6.57, body extent -3.1,-6.3 3.1,6.3, height 1.2
DO-214AB [mil] "DO-214-AB/SMC; 2 C-Bend Leads; Body 7.9 x 5.9 mm, inc. leads (LxW)"
  rect 60x126 smd: 1(-121.81,0) 2(121.81,0)
  silkscreen extent -170,-120 179,120
"HDR1X4 for IDC" [mm] "Connector; Header; 4 Position"
  rect 1.5x1.5 hole 0.9: 1(0,0)
  round 1.5 hole 0.9: 2(2.54,0) 3(5.08,0) 4(7.62,0)
  silkscreen extent -1.4,-2.54 8.89,2.54
"HDR1X8 for IDC" [mm] "Connector; Header; 8 Position"
  rect 1.5x1.5 hole 0.9: 1(0,0)
  round 1.5 hole 0.9: 2(2.54,0) 3(5.08,0) 4(7.62,0) 5(10.16,0) 6(12.7,0) 7(15.24,0) 8(17.78,0)
  silkscreen extent -1.4,-2.54 19.05,2.54
HDR2X7 [mm] "Connector; Header; 7x2 Position"
  rect 1.5x1.5 hole 0.9: 1(0,0)
  round 1.5 hole 0.9: 2(0,2.54) 3(2.54,0) 4(2.54,2.54) 5(5.08,0) 6(5.08,2.54) 7(7.62,0) 8(7.62,2.54) 9(10.16,0) 10(10.16,2.54) 11(12.7,0) 12(12.7,2.54) 13(15.24,0) 14(15.24,2.54)
  silkscreen extent -1.27,-1.27 16.51,3.81
"HDR-3 PIN W/SCREW" [mm] "TYCO p/n 796867-3"
  rect 2.5x2.5 hole 1.5: 1(-7.62,0)
  round 2.5 hole 1.5: 2(-2.54,0) 3(2.54,0)
  silkscreen extent -15.16,-6.25 10.16,6.25
"IM481H VERTICAL" [mil] "Stepper motor driver"
  round 218.9 hole 166.14: 0(-1224.41,334.65)
  rect 70x70 hole 40: 1(-1000,0)
  round 70 hole 40: 2(-900,0) 3(-800,0) 4(-700,0) 5(-600,0) 6(-500,0) 7(-400,0) 8(-300,0) 9(-200,0) 10(-100,0) 11(0,0) 12(100,0) 13(200,0) 14(300,0) 15(400,0) 16(500,0) 17(600,0) 18(700,0) 19(800,0) 20(900,0) 21(1000,0)
  Top Layer (*.GTL) keep-out region: -1027.56,531.5 -1421.26,531.5 -1421.26,137.8 -1027.56,137.8 -1027.56,334.65
  silkscreen extent -1350,-138 1350,59
"Inductor TDC SLF" [mm] "SLF series"
  rect 2.2x1.5 smd: 1(0,3.2) 2(0,-3.2)
  silkscreen extent -3.5,-3.5 3.5,3.5
PHOTO-SENSOR [mil] "Omron EE-SX1046"
  round 50 hole 30: A(0,98.43) C(275.59,0) E(275.59,98.43) K(0,0)
  silkscreen extent -59,-49 335,207
"PolySwitch Radial 0.2" [mm] "PolySwitch footprint"
  round 2 hole 1.2: 1(-2.54,0) 2(2.54,0)
  silkscreen extent -7,-1.5 7,1.5
PSIP_3_SMD [mil] "Plastic Single-In-Line Module, 3 pins"
  rect 150x200 smd: 0(-225,550) 0(225,550)
  rect 40x200 smd: 1(100,-575) 2(0,-575) 3(-100,-575)
  silkscreen extent -450,-470 450,470
Q-14_A [mm] "DIP; 14 Leads; Row Spacing 7.62 mm; Pitch 2.54 mm"
  rect 1.5x1.5 hole 0.9: 1(-7.62,-3.81)
  round 1.5 hole 0.9: 2(-5.08,-3.81) 3(-2.54,-3.81) 4(0,-3.81) 5(2.54,-3.81) 6(5.08,-3.81) 7(7.62,-3.81) 8(7.62,3.81) 9(5.08,3.81) 10(2.54,3.81) 11(0,3.81) 12(-2.54,3.81) 13(-5.08,3.81) 14(-7.62,3.81)
  silkscreen extent -9.85,-2.65 9.85,2.65
"RJ45, VERT MOUNT, NO MAGNETICS" [mil] "Amphenol p/n RJHSE-3381"
  rect 55x55 hole 35: 1(0,0)
  round 55 hole 35: 2(-40,-100) 3(-80,0) 4(-120,-100) 5(-160,0) 6(-200,-100) 7(-240,0) 8(-280,-100) 9(130,95) 10(40,95) 11(-320,95) 12(-410,95)
  round 85 hole 62: 13(180,32) 14(-460,32)
  round 116.14 hole 127.95 unplated: MH1(110,-135) MH2(-390,-135)
  silkscreen extent -460,-235 180,305
S8_M [mm] "SOIC, 8-Leads, Body 4.9x3.9mm, Pitch 1.27mm, IPC Low Density"
  oval 2.5x0.7 smd: 1(-2.45,1.905) 2(-2.45,0.635) 3(-2.45,-0.635) 4(-2.45,-1.905) 5(2.45,-1.905) 6(2.45,-0.635) 7(2.45,0.635) 8(2.45,1.905)
  silkscreen extent -3.81,-2.5 0.8,3.04, body extent -2,-2.5 2,2.5, height 1.76
SMD_0805 [mil]
  rect 50x50 smd: 1(-45,0) 2(45,0)
  silkscreen extent -1,-1 1,1
smd_0805 [mil]
  rect 50x50 smd: 1(-45,0) 2(45,0)
  silkscreen extent -1,-1 1,1
SMD_1206 [mil]
  rect 63x75 smd: 1(-55,0) 2(55,0)
SMD_CAP_3216 [mil]
  rect 78x48 smd: 1(55,0) 2(-55,0)
  silkscreen extent -108,-65 134,38
SMD_CAP_7343 [mil]
  rect 102x94 smd: NEG(-126,0) POS(126,0)
  silkscreen extent -145,-80 220,80
"SMD_TEST POINT" [mil] "Keystone 5015"
  rect 135x70 smd: 1(0,0)
"SUPERFIN FOOTPRINT" [mm] "SAMTEC QTH-060-01-L-D-A (x2)"
  round 5.6 hole 4.22: 0(0,43) 0(84,0) 0(84,43)
  round 1 hole 1.02 unplated: 0(38.04,13.08) 0(38.04,33.15) 1(-0.44,33.15) 1(-0.44,13.08)
  rect 0.3x1.45 smd paste+0 mask+0.05: A1(36.05,12.03) A2(36.05,18.21) A2(36.05,18.21) A3(35.55,12.03) A4(35.55,18.21) A5(35.05,12.03) A6(35.05,18.21) A7(34.55,12.03) A8(34.55,18.21) A9(34.05,12.03) A10(34.05,18.21) A11(33.55,12.03) A12(33.55,18.21) A13(33.05,12.03) A14(33.05,18.21) A15(32.55,12.03) A16(32.55,18.21) A17(32.05,12.03) A18(32.05,18.21) A19(31.55,12.03) A20(31.55,18.21) A21(31.05,12.03) A22(31.05,18.21) A23(30.55,12.03) A24(30.55,18.21) A25(30.05,12.03) A26(30.05,18.21) A27(29.55,12.03) A28(29.55,18.21) A29(29.05,12.03) A30(29.05,18.21) A31(28.55,12.03) A32(28.55,18.21) A33(28.05,12.03) A34(28.05,18.21) A35(27.55,12.03) A36(27.55,18.21) A37(27.05,12.03) A38(27.05,18.21) A39(26.55,12.03) A40(26.55,18.21) A41(26.05,12.03) A42(26.05,18.21) A43(25.55,12.03) A44(25.55,18.21) A45(25.05,12.03) A46(25.05,18.21) A47(24.55,12.03) A48(24.55,18.21) A49(24.05,12.03) A50(24.05,18.21) A51(23.55,12.03) A52(23.55,18.21) A53(23.05,12.03) A54(23.05,18.21) A55(22.55,12.03) A56(22.55,18.21) A57(22.05,12.03) A58(22.05,18.21) A59(21.55,12.03) A60(21.55,18.21) A61(16.05,12.03) A62(16.05,18.21) A63(15.55,12.03) A64(15.55,18.21) A65(15.05,12.03) A66(15.05,18.21) A67(14.55,12.03) A68(14.55,18.21) A69(14.05,12.03) A70(14.05,18.21) A71(13.55,12.03) A72(13.55,18.21) A73(13.05,12.03) A74(13.05,18.21) A75(12.55,12.03) A76(12.55,18.21) A77(12.05,12.03) A78(12.05,18.21) A79(11.55,12.03) A80(11.55,18.21) A81(11.05,12.03) A82(11.05,18.21) A83(10.55,12.03) A84(10.55,18.21) A85(10.05,12.03) A86(10.05,18.21) A87(9.55,12.03) A88(9.55,18.21) A89(9.05,12.03) A90(9.05,18.21) A91(8.55,12.03) A92(8.55,18.21) A93(8.05,12.03) A94(8.05,18.21) A95(7.55,12.03) A96(7.55,18.21) A97(7.05,12.03) A98(7.05,18.21) A99(6.55,12.03) A100(6.55,18.21) A101(6.05,12.03) A102(6.05,18.21) A103(5.55,12.03) A104(5.55,18.21) A105(5.05,12.03) A106(5.05,18.21) A107(4.55,12.03) A108(4.55,18.21) A109(4.05,12.03) A110(4.05,18.21) A111(3.55,12.03) A112(3.55,18.21) A113(3.05,12.03) A114(3.05,18.21) A115(2.55,12.03) A116(2.55,18.21) A117(2.05,12.03) A118(2.05,18.21) A119(1.55,12.03) A120(1.55,18.21) B1(36.05,32.1) B2(36.05,38.28) B2(36.05,38.28) B3(35.55,32.1) B4(35.55,38.28) B5(35.05,32.1) B6(35.05,38.28) B7(34.55,32.1) B8(34.55,38.28) B9(34.05,32.1) B10(34.05,38.28) B11(33.55,32.1) B12(33.55,38.28) B13(33.05,32.1) B14(33.05,38.28) B15(32.55,32.1) B16(32.55,38.28) B17(32.05,32.1) B18(32.05,38.28) B19(31.55,32.1) B20(31.55,38.28) B21(31.05,32.1) B22(31.05,38.28) B23(30.55,32.1) B24(30.55,38.28) B25(30.05,32.1) B26(30.05,38.28) B27(29.55,32.1) B28(29.55,38.28) B29(29.05,32.1) B30(29.05,38.28) B31(28.55,32.1) B32(28.55,38.28) B33(28.05,32.1) B34(28.05,38.28) B35(27.55,32.1) B36(27.55,38.28) B37(27.05,32.1) B38(27.05,38.28) B39(26.55,32.1) B40(26.55,38.28) B41(26.05,32.1) B42(26.05,38.28) B43(25.55,32.1) B44(25.55,38.28) B45(25.05,32.1) B46(25.05,38.28) B47(24.55,32.1) B48(24.55,38.28) B49(24.05,32.1) B50(24.05,38.28) B51(23.55,32.1) B52(23.55,38.28) B53(23.05,32.1) B54(23.05,38.28) B55(22.55,32.1) B56(22.55,38.28) B57(22.05,32.1) B58(22.05,38.28) B59(21.55,32.1) B60(21.55,38.28) B61(16.05,32.1) B62(16.05,38.28) B63(15.55,32.1) B64(15.55,38.28) B65(15.05,32.1) B66(15.05,38.28) B67(14.55,32.1) B68(14.55,38.28) B69(14.05,32.1) B70(14.05,38.28) B71(13.55,32.1) B72(13.55,38.28) B73(13.05,32.1) B74(13.05,38.28) B75(12.55,32.1) B76(12.55,38.28) B77(12.05,32.1) B78(12.05,38.28) B79(11.55,32.1) B80(11.55,38.28) B81(11.05,32.1) B82(11.05,38.28) B83(10.55,32.1) B84(10.55,38.28) B85(10.05,32.1) B86(10.05,38.28) B87(9.55,32.1) B88(9.55,38.28) B89(9.05,32.1) B90(9.05,38.28) B91(8.55,32.1) B92(8.55,38.28) B93(8.05,32.1) B94(8.05,38.28) B95(7.55,32.1) B96(7.55,38.28) B97(7.05,32.1) B98(7.05,38.28) B99(6.55,32.1) B100(6.55,38.28) B101(6.05,32.1) B102(6.05,38.28) B103(5.55,32.1) B104(5.55,38.28) B105(5.05,32.1) B106(5.05,38.28) B107(4.55,32.1) B108(4.55,38.28) B109(4.05,32.1) B110(4.05,38.28) B111(3.55,32.1) B112(3.55,38.28) B113(3.05,32.1) B114(3.05,38.28) B115(2.55,32.1) B116(2.55,38.28) B117(2.05,32.1) B118(2.05,38.28) B119(1.55,32.1) B120(1.55,38.28)
  rect 2.54x0.64 smd: A121(20.355,15.12) A121(37.245,15.12) A122(0.355,15.12) A122(17.245,15.12) B121(20.355,35.19) B121(37.245,35.19) B122(0.355,35.19) B122(17.245,35.19)
  rect 4.7x0.64 smd: A121(25.625,15.12) A121(31.975,15.12) A122(5.625,15.12) A122(11.975,15.12) B121(25.625,35.19) B121(31.975,35.19) B122(5.625,35.19) B122(11.975,35.19)
  silkscreen extent -3,-3.5 87,46.5
"TARGET MECHANICAL 5" [mil]
THERMOCOUPLE [mil] "Omega, PCB mount, vertical"
  round 120 hole 70: 0(0,270) 0(0,0) 1(500,62) 2(750,62)
  silkscreen extent -1190,-45 830,325
"USB Vertical PCB" [mm] "EDAC USB typeB p/n 690-004-260-023"
  round 2 hole 0.92: 1(-4.77,2.71) 2(-7.27,2.71) 3(-7.27,-0.49) 4(-4.77,-0.49)
  round 4 hole 2.3: 5(-12.04,0) 6(0,0)
  silkscreen extent -12,-4.6 0,6.6
Z03A [mm] "TO, Flat Index; 3 In-Line, Axial Leads; Body Dia. 5mm; Leads 0.55 x 0.50 mm (max)"
  rect 2x1 hole 0.75: 1(0,-1.27)
  oval 2x1 hole 0.75: 2(0,0) 3(0,1.27)
  silkscreen extent -2.6,-3.02 1.61,2.6, body extent -2.61,-2.61 1.6,2.61, height 5.2

## Part data
C1 C2 C3: library part "Cap 220uF, 63V", "CAP 220UF 63V ELECT MVH SMD"
C4 C5 C6 C11 C14 C20 C22 C23 C24 C25 C26 C27 C28 C29 C30 C31 C32 C33: "Capacitor"
C7 C8 C9 C16 C17: library part "Cap Tant 16V", "outline 3.2mm x 1.6mm"
C10 C21: library part Cap, "Capacitor"
C12: library part "Cap Tant 35V", "outline 6.0mm x 3.2mm"
C13 C15 C18 C19: library part "Cap SMD", "Capacitor"
D1: library part Diode, "Default Diode"
F1: library part "Fuse Thermal", "PolySwitch RUE Series"
J1: library part "Header 6", "Header, 6-Pin"
J2 J3 J4: library part "Thermocouple Connector", "T/C Conn PCB mount vertical"
J5: library part "CONN RJ-45 w/o magnetics", "Vertical PC mount, w/o magnetics"
J6: library part "Header 7X2", "Header, 7-Pin, Dual row"
J7 J8 J9: "Header, 8-Pin"
L1: library part "Ethernet Magnetics module", "10/100BT Magnetics Module"
L2 L3: library part "Inductor SMD 10uH 1.8A", "Inductor"
P1 P3 P4 P5 P6 P7: "Header, 4-Pin"
P2: library part "Header 3 PWR", "Header, 3-Pin"
R1 R2 R3 R4 R5 R6 R7 R8 R9 R10 R11 R12 R13 R14 R15 R16 R17 R19 R26 R27 R28 R29 R30 R31 R32 R33 R34 R35 R36 R37 R38 R39 R40 R41 R42: library part "Res SMD", "Resistor 0805"
R18: library part Res3, "Resistor"
R20 R21 R22 R23 R24 R25: "Resistor"
S1 S2 S3: library part SW-PB, "Switch"
TP1 TP2 TP3 TP4 TP5 TP6 TP7 TP8 TP9 TP10 TP11 TP12 TP13 TP14 TP15 TP16 TP17 TP18 TP19 TP20 TP21 TP22 TP23 TP24 TP25 TP26 TP27 TP28 TP29: "SMD loop test point"
U1 U2 U3: "Hybrid stepper motor driver"
U4 U5: "16-Bit Buffer/Driver with 3-State Outputs"
U6 U7 U8 U9 U10 U11: library part Photo-sensor, "Omron EE-SX1046"
U12 U13 U16: "Monolithic Thermocouple Amplifier with Cold Junction Compensation"
U14 U15 U17: "Low Noise BJT input opamp"
U19: "Precision Temperature Sensor"
U20: library part "Volt Reg", "Voltage Regulator"
U21: "1A uPwr Step-Down switching regulator"
U22: "IC VOLT CONV SW-CAP W/SHTDN8SOIC"
U23: "IC CONV STP-DWN ADJ 8-DFN"

## Free pads (board coordinates)
  round 236.22 hole 118.11: 0(1115,-2804)
  round 531.25 hole 531.25 unplated: 1(-2952.74,354.32)
  round 334.65 hole 334.65 unplated: 1(-1445.06,387.2) 1(-1057.86,1057.86) 1(-387.19,-1445.1) 1(387.23,-1445.1) 1(1057.9,1057.86) 1(1445.11,387.2)
  round 413.39 hole 216.54: 1(-1193.32,688.96) 1(0.02,-1377.97) 1(1193.36,688.96)

## Via types
v1: diameter 24, hole 12, Top Layer (*.GTL) to Bottom Layer (*.GBL), 349 vias
v2: diameter 50, hole 25, Top Layer (*.GTL) to Bottom Layer (*.GBL), 10 vias
v3: diameter 25.98, hole 12.99, Top Layer (*.GTL) to Bottom Layer (*.GBL), tented top, 4 vias
v4: diameter 30, hole 15, Top Layer (*.GTL) to Bottom Layer (*.GBL), 1 vias
v5: diameter 20, hole 12, Top Layer (*.GTL) to Bottom Layer (*.GBL), 1 vias

## Nets (pads, with @x,y where several pads share a name; then routed paths per layer and width w, separated by ;. In a path a pad name is that pad's centre, name@x,y a point inside that pad or via, vN(x,y) a via of type N, cw(c..) or ccw(c..) an arc to the next point about the centre after c; other vN are vias at no path point)
1A+: J8.6 U4.32 | length 3827
  Top Layer (*.GTL) w5: U4.32@438.6,1182.71 438.6,1273 454.55,1288.94 454.55,1490 v1(455,1490)
  Bottom Layer (*.GBL) w5: J8.6@-2736,1686.01 -2736,1680.93 -2693,1637.93 -2693,1632.85 -2650,1589.85 -2650,1584.77 -2628.61,1563.39 -2591.61,1563.39 -2539.03,1615.97 -2228.1,1615.97 -2113.07,1731 -1104.93,1731 -752.97,1379.03 19.97,1379.03 20.93,1380 52,1380 161.5,1489.5 v1@456,1489.5
1A-: J8.5 U4.33 | length 3809.3
  Top Layer (*.GTL) w5: U4.33@418.92,1182.71 418.92,1273 424.55,1278.63 424.55,1455 v1(425,1455)
  Bottom Layer (*.GBL) w5: J8.5@-2786,1599.41 -2786,1594.33 -2743,1551.33 -2743,1546.25 -2694.38,1497.62 -2636.16,1497.62 -2532.82,1600.97 -2221.89,1600.97 -2106.85,1716 -1111.15,1716 -759.18,1364.03 13.75,1364.03 15.39,1362.39 57.02,1362.39 149.12,1454.5 v1@425,1454.5
1B+: J8.4 U4.35 | length 3805.2
  Top Layer (*.GTL) w5: U4.35@379.55,1182.71 379.55,1273 394.55,1288 394.55,1425 v1(395,1425)
  Bottom Layer (*.GBL) w5: J8.4@-2836,1512.81 -2836,1507.73 -2760.14,1431.86 -2680.71,1431.86 -2526.61,1585.97 -2215.67,1585.97 -2100.64,1701 -1117.36,1701 -765.39,1349.03 66.29,1349.03 142.25,1425 v1(395,1425)
1B-: J8.3 U4.36 | length 3791.5
  Top Layer (*.GTL) w5: U4.36@359.86,1182.71 359.86,1398 v1(360,1398)
  Bottom Layer (*.GBL) w5: J8.3@-2886,1426.21 -2825.9,1366.1 -2725.26,1366.1 -2520.39,1570.97 -2209.46,1570.97 -2094.43,1686 -1123.57,1686 -771.61,1334.03 73.92,1334.03 138.88,1399 v1@360,1399
1I+: J8.2 U4.37 | length 3788.3
  Top Layer (*.GTL) w5: v1(334,1364) 334.55,1364 334.55,1278.63 340.18,1273 U4.37@340.18,1182.71
  Bottom Layer (*.GBL) w5: J8.2@-2936,1339.6 -2930.92,1339.6 -2891.66,1300.34 -2769.81,1300.34 -2514.18,1555.97 -2203.25,1555.97 -2088.21,1671 -1129.79,1671 -777.82,1319.03 81.54,1319.03 126.25,1363.75 v1@334,1363.75
1I-: J8.1 U4.38 | length 3791.1
  Top Layer (*.GTL) w5: v1(305,1335) 304.55,1335 304.55,1288.94 320.49,1273 U4.38@320.49,1182.71
  Bottom Layer (*.GBL) w5: J8.1@-2986,1253 -2980.92,1253 -2974.52,1246.6 -2969.44,1246.6 -2957.42,1234.58 -2814.35,1234.58 -2507.97,1540.97 -2197.03,1540.97 -2082,1656 -1136,1656 -784.03,1304.03 89.17,1304.03 120.14,1335 v1(305,1335)
2A+: J7.6 U4.40 | length 5528.4
  Top Layer (*.GTL) w5: v1@-149,-3120 377.99,-3120 497,-3000.99 497,-2403 414,-2320 414,-2003.02 762,-1655.02 762,184.86 692,254.86 692,994.64 600.64,1086 340.31,1086 281.12,1145.19 U4.40@281.12,1182.71
  Bottom Layer (*.GBL) w5: J7.6@-150,-3237 -150,-3122 v1(-147,-3119)
2A-: J7.5 U4.41 | length 5419.2
  Top Layer (*.GTL) w5: v1@-49,-3074 364.59,-3074 484,-2954.59 484,-2408.38 401,-2325.38 401,-1997.64 749,-1649.64 749,179.47 679,249.47 679,994.91 596.91,1077 329.63,1077 261.44,1145.19 U4.41@261.44,1182.71
  Bottom Layer (*.GBL) w5: J7.5@-50,-3237 -50,-3076 v1(-49,-3075)
2B+: J7.4 U4.43 | length 5333.5
  Top Layer (*.GTL) w5: v1(51,-3028) 351.19,-3028 471,-2908.19 471,-2413.77 388,-2330.77 388,-1992.25 736,-1644.25 736,174.09 666,244.09 666,995.18 593.18,1068 299.26,1068 222.07,1145.19 U4.43@222.07,1182.71
  Bottom Layer (*.GBL) w5: J7.4@50,-3237 50,-3029 v1(51,-3028)
2B-: J7.3 U4.44 | length 5227.6
  Top Layer (*.GTL) w5: v1@153,-2982 v1(152,-2982) 337.79,-2982 458,-2861.79 458,-2419.15 375,-2336.15 375,-1986.87 723,-1638.87 723,168.7 653,238.7 653,995.46 589.46,1059 288.57,1059 202.38,1145.19 U4.44@202.38,1182.71
  Bottom Layer (*.GBL) w5: J7.3@150,-3237 150,-2984 v1(152,-2982)
2I+: J7.2 U4.46 | length 5142.9
  Top Layer (*.GTL) w5: U4.46@163.01,1182.71 163.01,1145.19 258.2,1050 585.73,1050 640,995.73 640,233.32 710,163.32 710,-1633.48 362,-1981.48 362,-2341.54 445,-2424.54 445,-2815.4 324.4,-2936 v1@251,-2936
  Bottom Layer (*.GBL) w5: v1(248,-2934) 250,-2936 J7.2@250,-3237
2I-: J7.1 U4.47 | length 5061.6
  Top Layer (*.GTL) w5: U4.47@143.33,1182.71 143.33,1145.19 247.52,1041 582,1041 627,996 627,227.93 697,157.93 697,-1628.1 349,-1976.1 349,-2346.92 432,-2429.92 432,-2769 v1@346,-2855
  Bottom Layer (*.GBL) w5: v1(349,-2853) 350,-2854 J7.1@350,-3237
3A+: J9.6 U5.27 | length 3448.7
  Top Layer (*.GTL) w5: U5.27@-102.97,1182.71 -102.97,1286 -69.21,1319.76 v1@-69.21,1445
  Mid-Layer 1 (*.G1) w5: v1(-70,1445) 164,1445 253,1534 1405,1534 1502,1437 1819.64,1437 1987.64,1605 2465,1605 2636.01,1433.99 J9.6@2885,1433.99
3A-: J9.5 U5.29 | length 3435.5
  Top Layer (*.GTL) w5: U5.29@-142.34,1182.71 -142.34,1286 -114.21,1314.13 v1@-114.21,1470
  Mid-Layer 1 (*.G1) w5: v1(-115,1473) 6.09,1473 7.09,1472 164.13,1472 245.13,1553 1398.73,1553 1505.73,1446 1815.91,1446 1983.91,1614 2489,1614 2582.41,1520.59 J9.5@2835,1520.59
3B+: J9.4 U5.30 | length 3423.7
  Top Layer (*.GTL) w5: U5.30@-162.03,1182.71 -162.03,1286 -159.21,1288.82 v1@-159.21,1510
  Mid-Layer 1 (*.G1) w5: v1(-160,1510) 154,1510 216,1572 1392.46,1572 1509.46,1455 1812.18,1455 1980.18,1623 2769.19,1623 J9.4@2785,1607.19
3B-: J9.3 U5.32 | length 3467.4
  Top Layer (*.GTL) w5: v1@-204.21,1540 -204.21,1288.81 -201.4,1286 U5.32@-201.4,1182.71
  Mid-Layer 1 (*.G1) w5: v1(-205,1540) 140,1540 191,1591 1386.18,1591 1513.18,1464 1808.46,1464 1976.46,1632 2430.46,1632 2492.25,1693.79 J9.3@2735,1693.79
3I+: J9.2 U5.33 | length 3524.2
  Top Layer (*.GTL) w5: v1@-249.21,1565 -249.21,1314.13 -221.08,1286 U5.33@-221.08,1182.71
  Mid-Layer 1 (*.G1) w5: v1(-250,1565) 115,1565 150,1600 809.86,1600 810.36,1600.5 825.68,1600.5 826.19,1601 1388.91,1601 1516.91,1473 1804.73,1473 1972.73,1641 2426.73,1641 2566.13,1780.4 J9.2@2685,1780.4
3I-: J9.1 U5.35 | length 3608
  Top Layer (*.GTL) w5: v1@-294.21,1606 -294.21,1319.76 -260.45,1286 U5.35@-260.45,1182.71
  Mid-Layer 1 (*.G1) w5: v1(-295,1605) 125,1605 149,1629 801.86,1629 810.86,1638 1364.64,1638 1520.64,1482 1801,1482 1969,1650 2423,1650 2635,1862 J9.1@2635,1867
+3.3V: C13.2 L2.2 R4.2 R5.2 R6.2 R18.2 R26.2 R27.2 R28.2 R32.2 TP27.1 U4.7 U4.18 U4.31 U4.42 U5.7 U5.18 U5.31 U5.42 U18.B121 U21.5 | length 1681.9
  Top Layer (*.GTL) w5: v1(-2411.98,-998) -2409.98,-1000 R27.2@-2339.98,-1000 ; v1(-2292.98,78) -2292.38,78.6 R18.2@-2292.38,135 ; R5.2@-1549.98,-1335 -1507.98,-1335 v1(-1505.98,-1333) ; v1(-251.98,2018) -239.98,2030 R4.2@-239.98,2065 ; R26.2@395.02,2510 442.02,2510 v1(443.02,2511) ; v1(1839.02,-859) 1840.02,-858 R6.2@1840.02,-810 ; v1(2174.02,-1368) 2175.02,-1369 R28.2@2175.02,-1430
  Top Layer (*.GTL) w10: v1(-2445.98,710) -2444.98,711 TP27.1@-2444.98,810 ; v1(-2400.98,1279) R32.2@-2357.98,1279 ; U18.B121@-538.96,-222.26 v1(-538.96,-156) U18.B121@-538.96,-14.78 U18.B121@-538.96,235.22 v1(-538.96,354) U18.B121@-538.96,442.7 ; v1(-398.98,1247) -398.25,1246.27 U5.42@-398.25,1182.71 ; U5.7@-398.25,897.28 -398.25,838.27 v1(-397.98,838) ; v1(-181.98,1246) -181.71,1245.73 U5.31@-181.71,1182.71 ; U5.18@-181.71,897.28 -181.71,953.27 v1(-180.98,954) ; v1(241.02,832) 241.75,832.73 U4.7@241.75,897.28 ; U4.42@241.75,1182.71 241.75,1242.73 v1(242.02,1243) ; v1(458.02,1241) 458.29,1240.73 U4.31@458.29,1182.71 ; U4.18@458.29,897.28 458.29,840.73 v1(459.02,840)
  other v1: -1837.98,619 -2262.98,634 -2002.98,649 -1837.98,674 -2267.98,709 -2267.98,774 -2162.98,774 -2107.98,774 -2057.98,774 -2007.98,774
+5V: C7.1 C8.1 C9.1 C12.POS J7.7 J8.7 J9.7 R1.2 R2.2 R3.2 TP17.1 U1.14 U2.14 U3.14 U18.A1 U20.3 | length 1029.5
  Top Layer (*.GTL) w5: R2.2@-1804.98,-1625 v1(-1757.98,-1625) ; R1.2@-314.98,2495 -313.98,2496 v1(-267.98,2496) ; R3.2@2435.02,-785 v1(2435.02,-729)
  Top Layer (*.GTL) w10: U18.A1@372.86,395.66 403.68,395.66 v1(425.02,417) ; v1(742.02,-1763) 745.02,-1766 TP17.1@745.02,-1860
  Top Layer (*.GTL) w30: U2.14@-2236.66,-1637.77 -2162.48,-1563.59 C8.1@-2162.48,-1477.63 ; U1.14@-299.98,2755.89 -299.98,2678 -261.98,2640 C7.1@-199.98,2640 ; C9.1@2362.52,-1127.37 2404.89,-1085 2503.55,-1085 U3.14@2536.7,-1118.16
  Top Layer (*.GTL) w50: C12.POS@675.02,-2369 v1(675.02,-2242) v1@677.02,-2240